# Altium PCB MCU_REVB.PcbDoc (part 1 of 2)
Units mil, origin at the board's own origin, x right, y up, seen from the top; angles counter-clockwise.
Board outline 3775 x 3976.97 mil, 4 copper layers (Top Layer, VCC_MCU_3V3, GND, Bottom Layer), stack 62.449 mil thick; 113 components, 143 nets, 484 pads, 119 vias.
Unrouted connection lines stored in the file: 108.
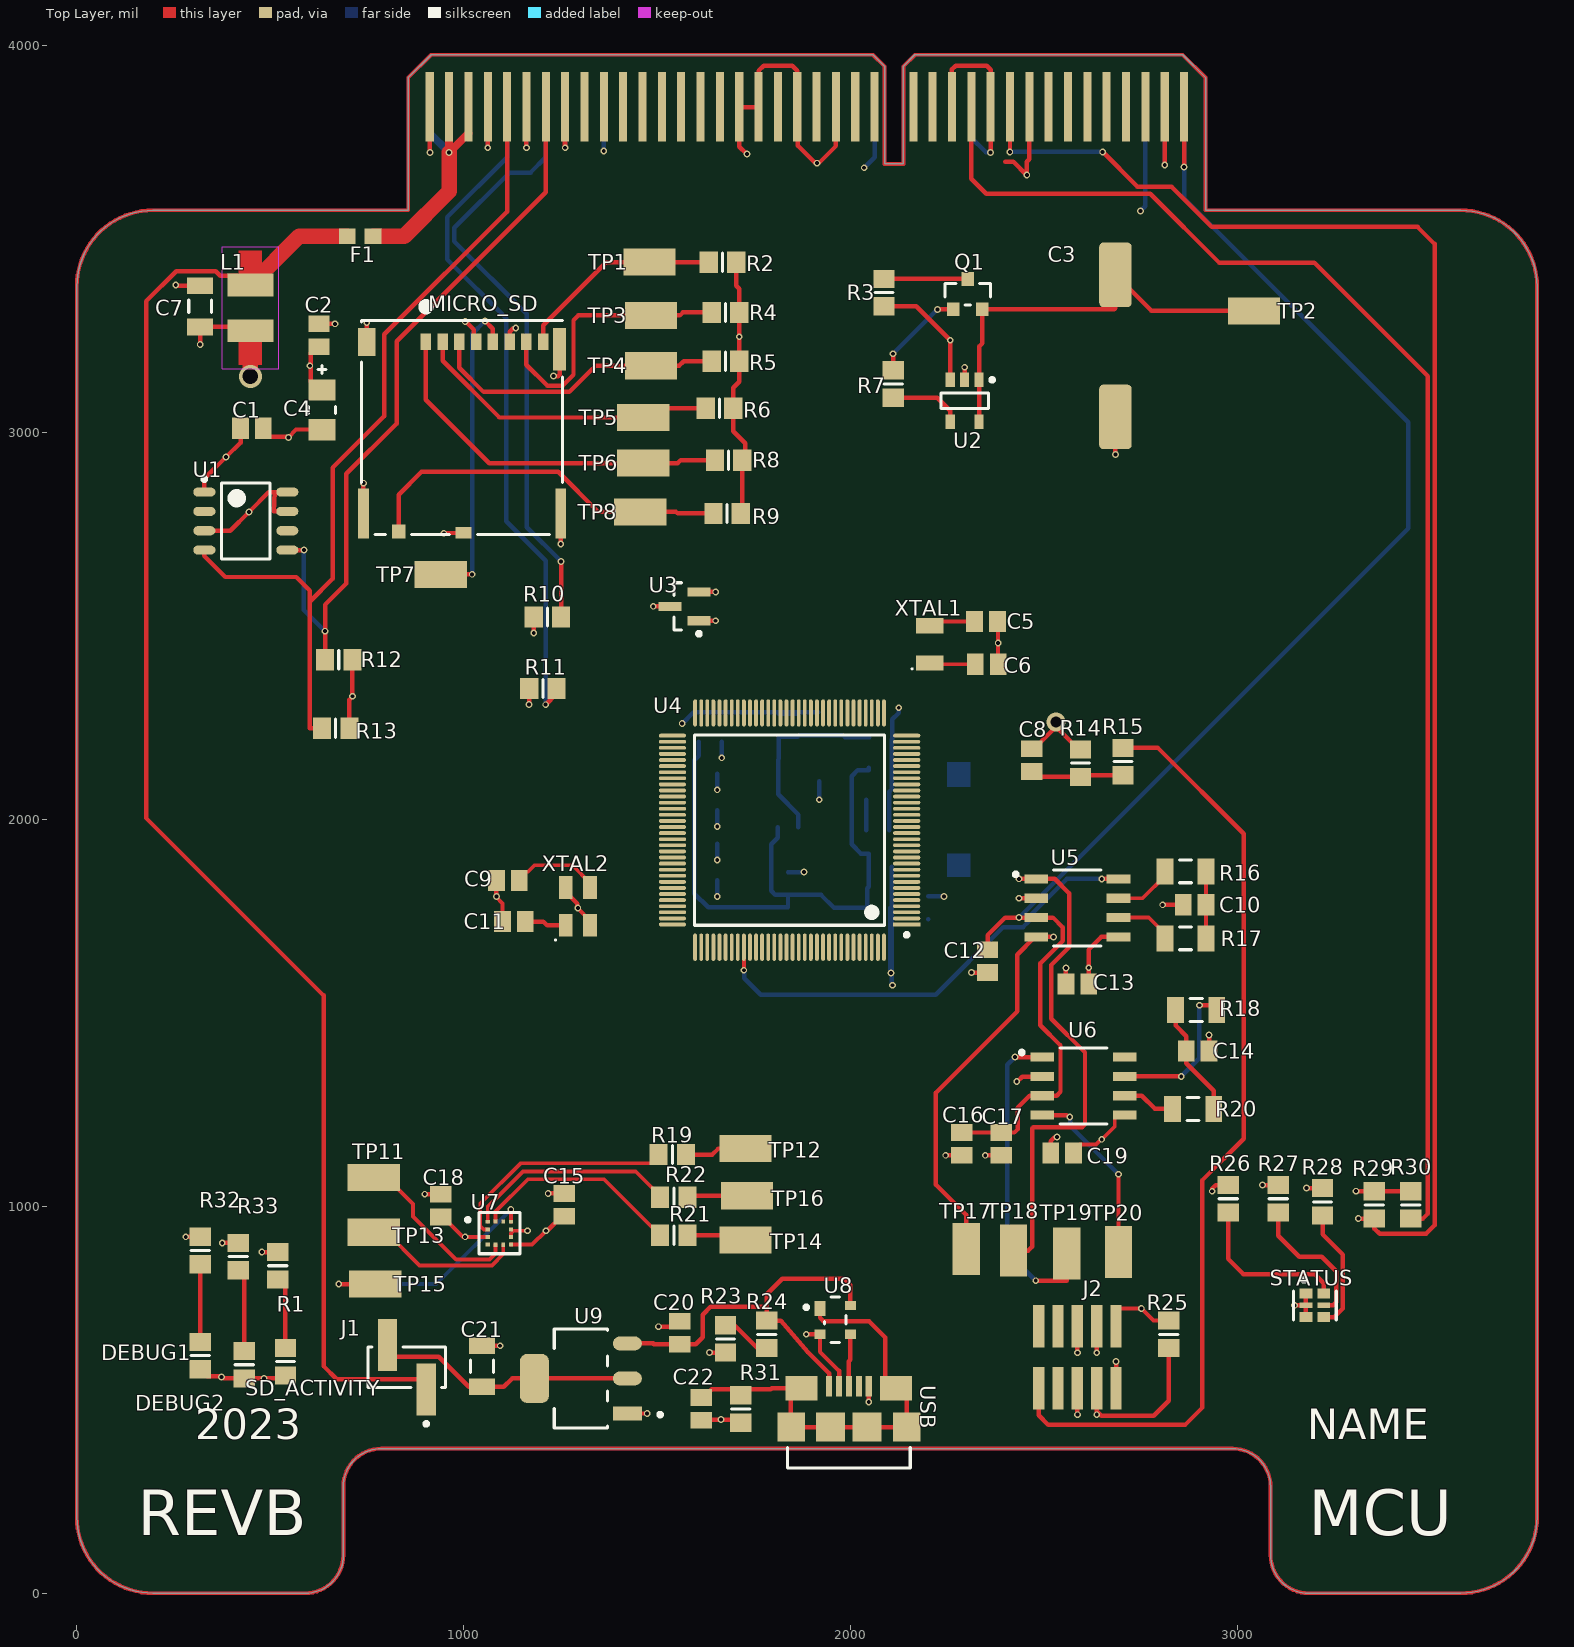
[diagram p0: Top Layer view]
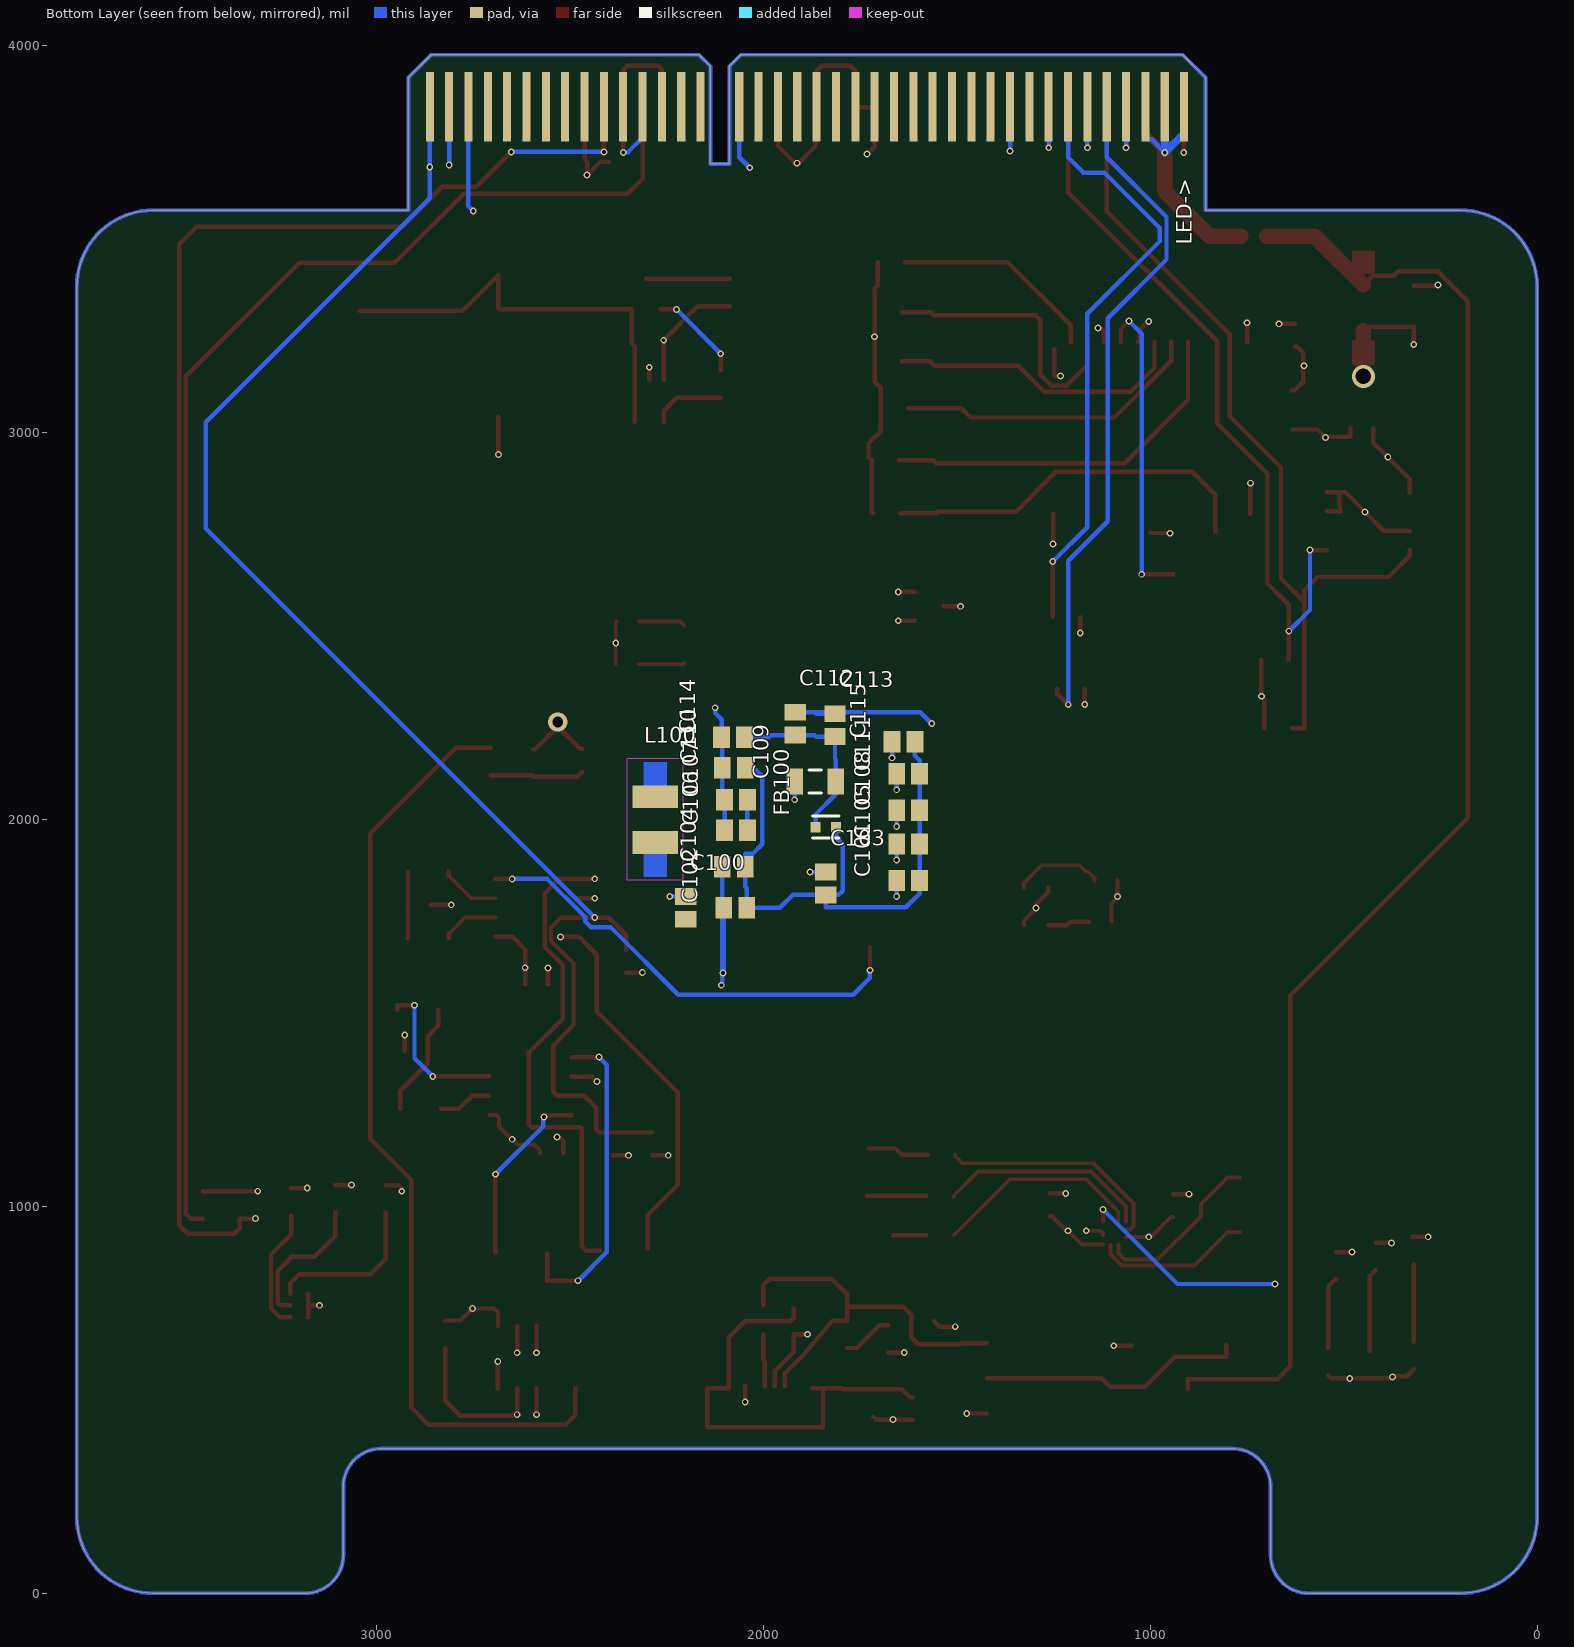
[diagram p1: Bottom Layer view, seen from below]
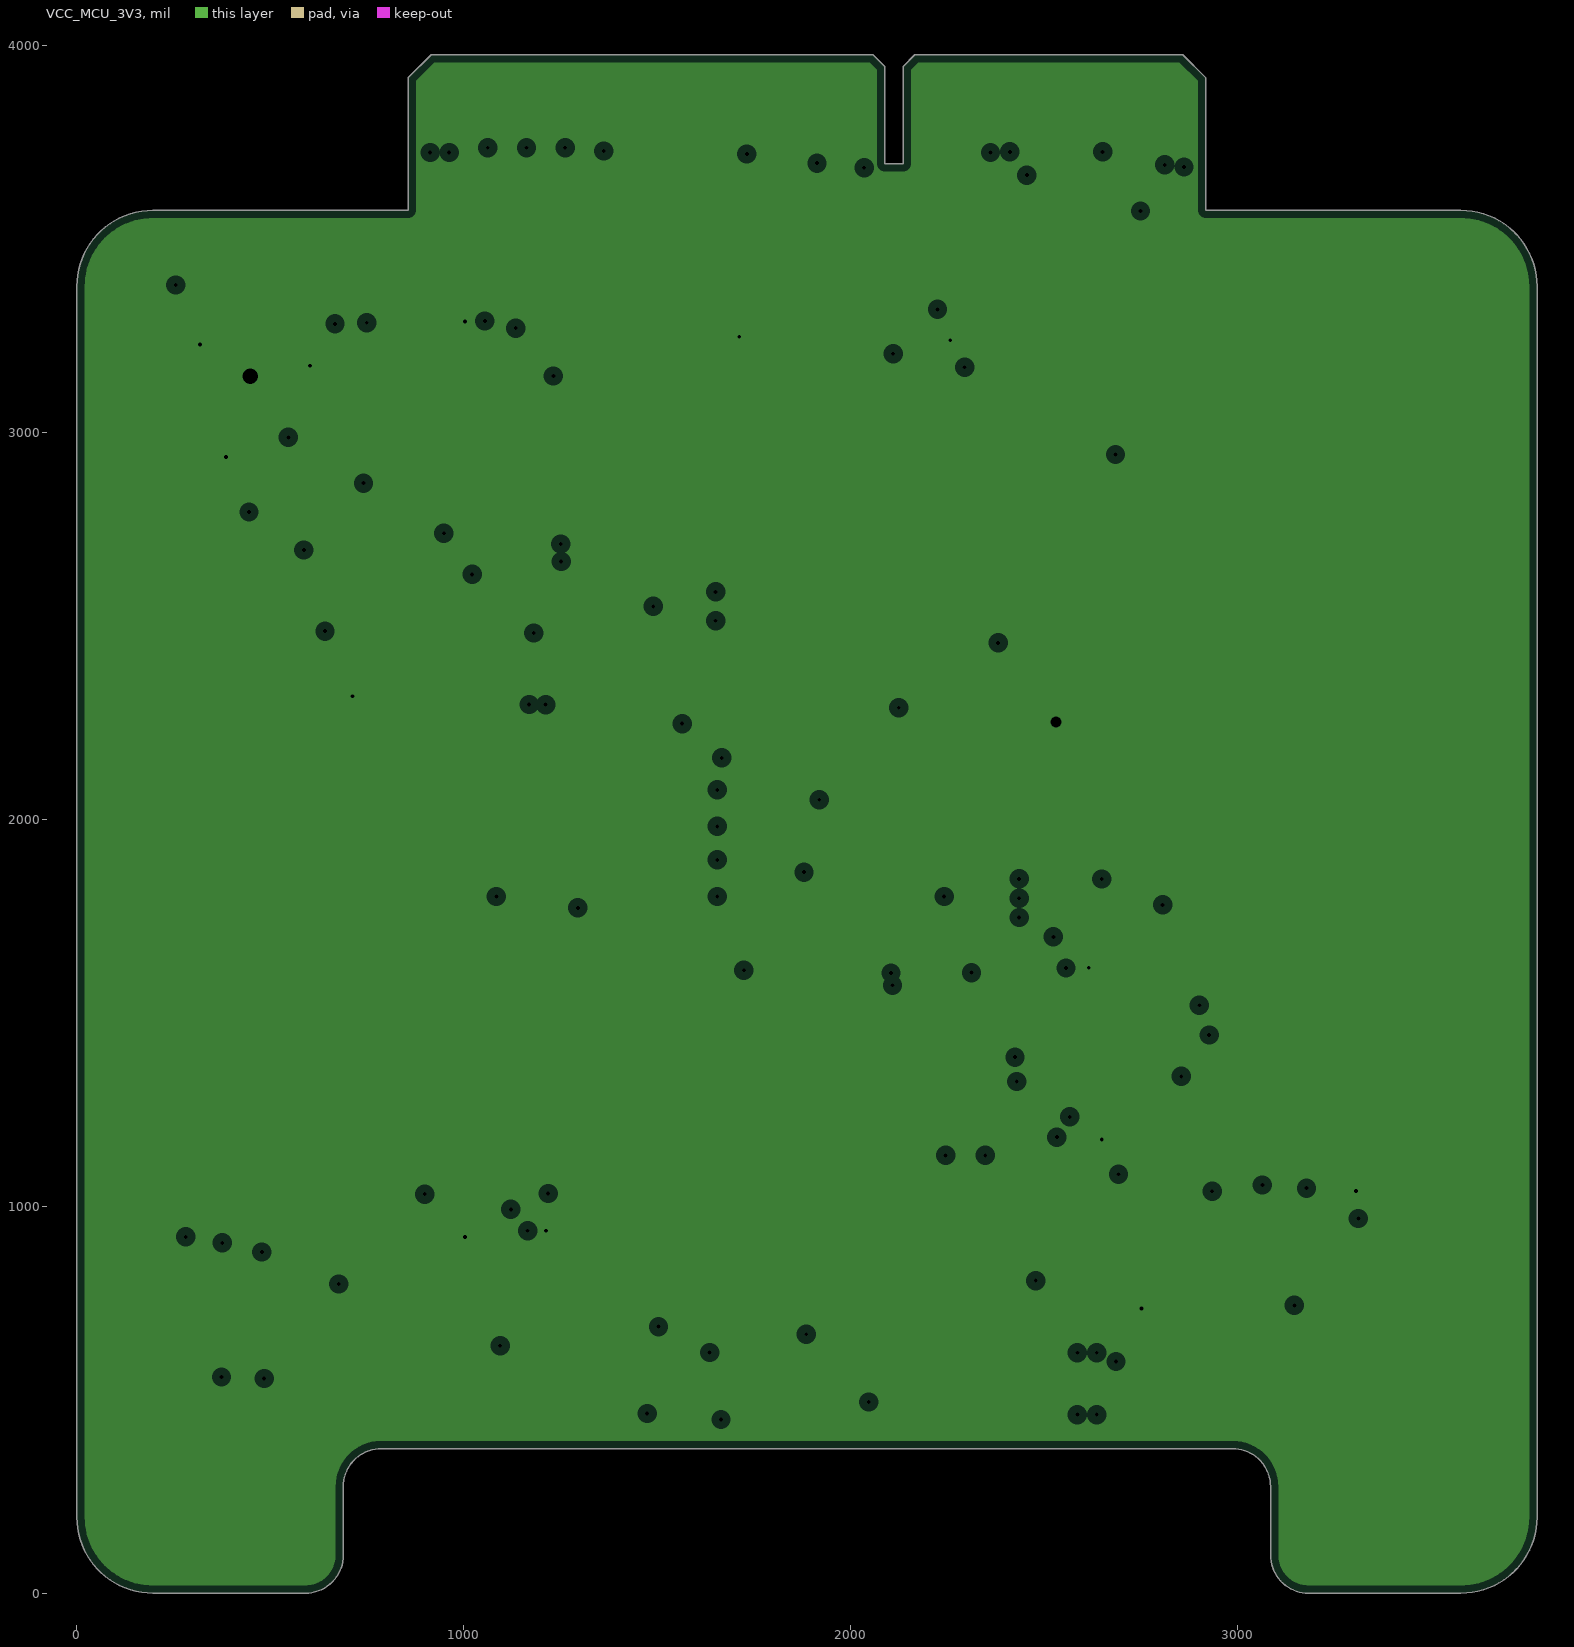
[diagram p2: VCC_MCU_3V3, clearances drawn from the general rule]
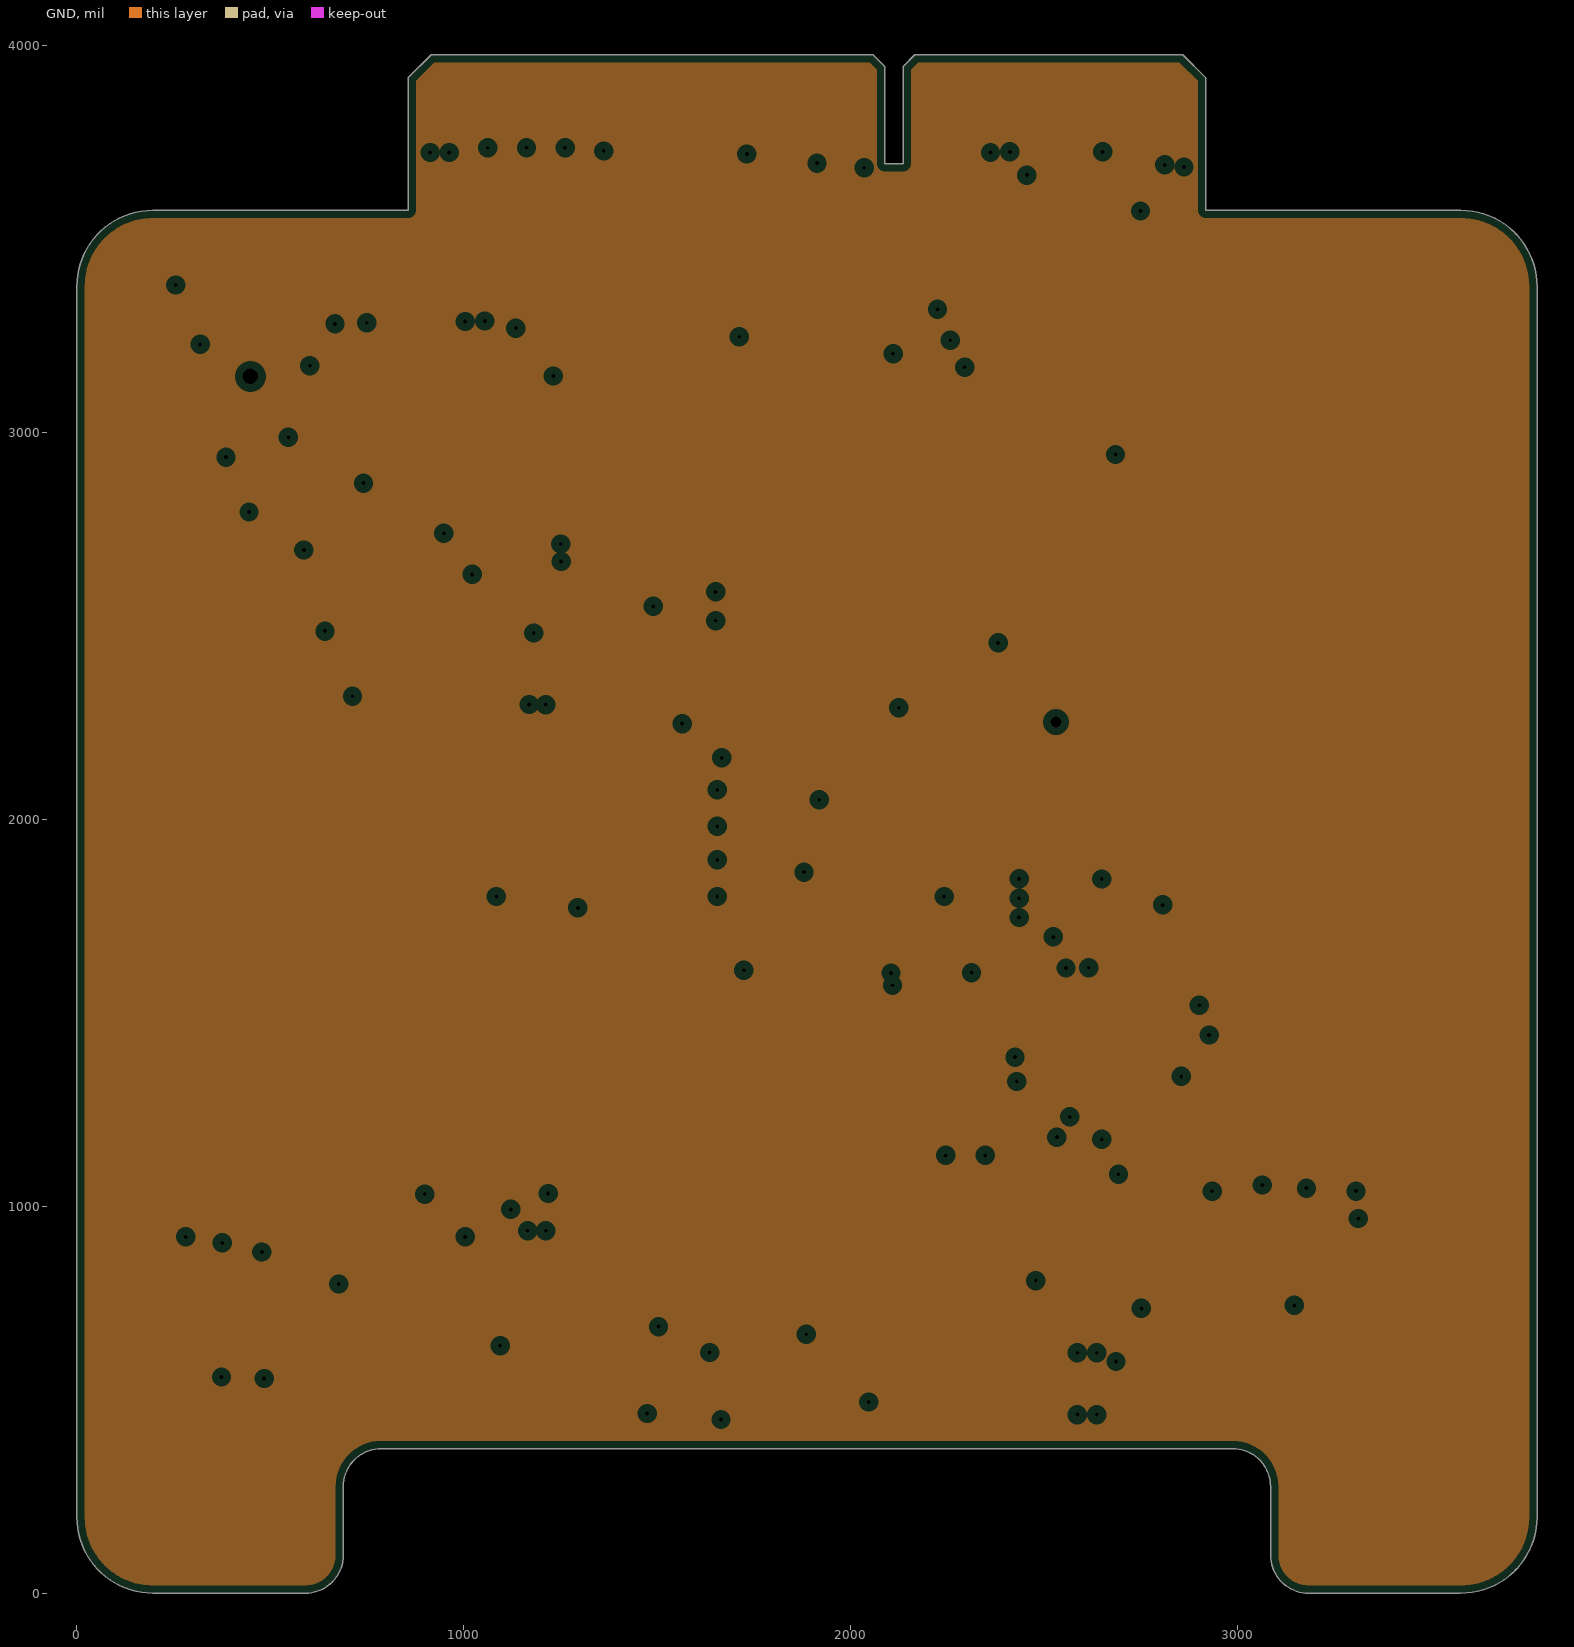
[diagram p3: GND, clearances drawn from the general rule]

## Layer stack, top to bottom
Top Solder: solder mask 0.8, Solder Resist, Dk 3.8
Top Layer: signal copper 1.378
Dielectric 2: prepreg 8.2835, PP-006, Dk 4.6
VCC_MCU_3V3: plane copper 0.5984, net VCC_MCU_3V3
Dielectric 1: dielectric 41.9291, FR-4, Dk 4.6
GND: plane copper 0.5984
Dielectric 3: prepreg 8.2835, PP-006, Dk 4.6
Bottom Layer: signal copper 1.378
Bottom Solder: solder mask 0.8, Solder Resist, Dk 3.8

## Board outline
196.85,0 590.55,0 ccw(c590.55,98.43) 688.98,98.43 688.98,275.59 cw(c787.4,275.59) 787.4,374.02 2987.6,374.02 cw(c2987.6,275.59) 3086.02,275.59 3086.02,98.43 ccw(c3184.45,98.43) 3184.45,0 3578.15,0 ccw(c3578.15,196.85) 3775,196.85 3775,3378.15 ccw(c3578.15,3378.15) 3578.15,3575 2917.99,3575 2917.99,3917.99 2858.94,3976.97 2166.42,3976.97 2136.89,3947.44 2136.89,3695.08 2088.09,3695.08 2088.07,3947.44 2058.54,3976.97 916.02,3976.97 856.97,3917.99 856.99,3575 196.85,3575 ccw(c196.85,3378.15) 0,3378.15 0,196.85 ccw(c196.85,196.85)

## Design rules (kind name [scope] priority, off if disabled: settings)
Clearance Clearance_2 [InComponent('U7')] p1: gap=10 ignorepadtopadclearanceinfootprint=FALSE except(0: Arc-Hole Track-Hole SMDPad-Hole THPad-Hole Via-Hole Fill-Hole Poly-Hole Region-Hole Text-Hole; 5: SMDPad-SMDPad; 9: Arc-Arc Arc-Track Arc-SMDPad Track-Track Track-SMDPad)
Clearance Clearance_1 [InComponent('U4')] p2: gap=10 ignorepadtopadclearanceinfootprint=FALSE except(0: Arc-Hole Track-Hole SMDPad-Hole THPad-Hole Via-Hole Fill-Hole Poly-Hole Region-Hole Text-Hole; 5: Arc-Arc Arc-Track Arc-SMDPad Track-Track Track-SMDPad SMDPad-SMDPad)
Clearance [All] p3: gap=10 ignorepadtopadclearanceinfootprint=FALSE except(0: Arc-Hole Track-Hole SMDPad-Hole THPad-Hole Via-Hole Fill-Hole Poly-Hole Region-Hole Text-Hole; 5: Arc-Arc Arc-Track Track-Track SMDPad-SMDPad THPad-THPad)
HoleSize [All] p1: absolutevalues=TRUE maxlimit=248.03 minlimit=7.87 maxpercent=80.000 minpercent=20.000
HoleToHoleClearance [All] p1: gap=19.68 allowstackedmicrovias=TRUE
MinimumAnnularRing "Via anular ring" [IsVia] p1: minimumring=3.5
MinimumAnnularRing [All] p2: minimumring=9.84
PlaneClearance [All] p1: clearance=20
PlaneConnect [All] p1: pad.planeconnectstyle=Relief pad.reliefexpansion=20 pad.reliefentries=4 pad.reliefconductorwidth=10 pad.reliefairgap=10 via.planeconnectstyle=Direct via.reliefexpansion=20 via.reliefentries=4 via.reliefconductorwidth=10 via.reliefairgap=10
PolygonConnect [All] p1: connectstyle=Relief reliefconductorwidth=10 reliefentries=4 polygonreliefangle="90 Angle" airgapwidth=10
RoutingVias [All] p1: holewidth=10 width=17.5 viastyle="Through Hole" minholewidth=7.87 minwidth=15.75 maxholewidth=248.03 maxwidth=251.97
SilkToSolderMaskClearance [IsPad] p1: minsilkscreentomaskgap=5.91 clearancetoexposedcopper=TRUE
SolderMaskExpansion [All] p1: expansion=1.97 istentingtop=FALSE
Width [All] p1: maxlimit=98.43 minlimit=5 preferedwidth=11.55 minimp=50.000000 maximp=50.000000 favimp=50.000000
25 further rules are at their usual default settings.

## Classes and differential pairs
component class MCU_REVB_0: F1
component class MCU_REVB_4: C10 C12 C13 C14 C16 C17 C19 R16 R17 R18 R20 TP17 TP18 TP19 TP20 U5 U6
component class MCU_REVB_1: C5 C6 C7 C8 C9 C11 C100 C101 C102 C103 C104 C105 C106 C107 C108 C109 C110 C111 C112 C113 C114 C115 FB100 L1 L100 R12 R13 R14 R15 R29 R30 TP11 TP12 TP13 TP14 TP15 TP16 U4 XTAL1 XTAL2
component class MCU_REVB_3: C20 C21 C22 J1 J2 R10 R11 R23 R24 R25 R31 U8 U9 USB
component class MCU_REVB_2: C1 C2 C3 C4 C15 C18 DEBUG1 DEBUG2 MICRO_SD Q1 R1 R2 R3 R4 R5 R6 R7 R8 R9 R19 R21 R22 R26 R27 R28 R32 R33 SD_ACTIVITY STATUS TP1 TP2 TP3 TP4 TP5 TP6 TP7 TP8 U1 U2 U3 U7

## Components (designator, comment, footprint, x,y, rotation, side; value= is the part's Value field where it differs from the comment)
C1 "0.1 µF" C0805 452.76,3011.81 r0 top
C2 "0.1 µF" C0805 625.98,3251.97 r90 top
C3 "FC0H473ZFTBR24" CAPAE1080X580N 2685.04,3224.41 r270 top
C4 "TAJA106K010RNJ" FP-TAJA-MFG 633.86,3059.06 r90 top
C5 "22 pF" C0805 2350.39,2511.81 r180 top
C6 "22 pF" C0805 2352.36,2401.57 r180 top
C7 "10 µF" C1206 318.9,3326.77 r90 top
C8 "100 pF" C0805 2468.5,2153.54 r270 top
C9 "18 pF" C0805 1114.17,1842.52 r0 top
C10 "4.7 µF" C0805 2889.76,1779.53 r180 top
C11 "18 pF" C0805 1129.92,1736.22 r0 top
C12 "0.1 µF" C0805 2354.33,1633.86 r90 top
C13 "0.1 µF" C0805 2586.61,1574.8 r0 top
C14 "4.7 µF" C0805 2897.64,1401.57 r0 top
C15 "0.1µF" C0805 1259.84,1003.94 r90 top
C16 "4.7 µF" C0805 2287.4,1161.42 r90 top
C17 "0.1 µF" C0805 2389.76,1161.42 r90 top
C18 "0.1 µF" C0805 940.95,1001.97 r90 top
C19 "0.1 µF" C0805 2547.24,1137.8 r0 top
C20 "0.1 µF" C0805 1559.06,673.23 r90 top
C21 "10 µF" C1206 1047.24,586.61 r90 top
C22 "4.7 nF" C0805 1614.17,476.38 r270 top
C100 "0.1 µF" C0805 2200.79,1771.65 r90 bottom
C101 "0.1 µF" C0805 1625.98,1842.52 r0 bottom
C102 "0.1 µF" C0805 2072.83,1771.65 r0 bottom
C103 "0.1 µF" C0805 1838.58,1834.65 r90 bottom
C104 "0.1 µF" C0805 2076.77,1877.95 r0 bottom
C105 "0.1 µF" C0805 1625.98,1937.01 r0 bottom
C106 "4.7 µF" C0805 2070.87,1972.44 r0 bottom
C107 "0.1 µF" C0805 2070.87,2051.18 r0 bottom
C108 "0.1 µF" C0805 1625.98,2023.62 r0 bottom
C109 "10 µF" C1206 1866.14,2098.43 r0 bottom
C110 "0.1 µF" C0805 2076.77,2133.86 r0 bottom
C111 "0.1 µF" C0805 1625.98,2118.11 r0 bottom
C112 "0.1 µF" C0805 1917.32,2248.03 r90 bottom
C113 "0.1 µF" C0805 1814.96,2244.09 r90 bottom
C114 "0.1 µF" C0805 2078.74,2212.6 r0 bottom
C115 "0.1 µF" C0805 1637.8,2200.79 r0 bottom
DEBUG1 "LEDSML0805" 6-0805_N 318.9,614.17 r270 top
DEBUG2 "LEDSML0805" 6-0805_N 433.07,590.55 r270 top
F1 "0603SFF150F/32-2" RESC1608X10N 732.28,3507.87 r180 top value=175mR
FB100 "BLM18PG471SN1D" FP-BLM18-0_15-t0_8-MFG 1838.58,1980.32 r0 bottom value=200mR
J1 "TSM-102-01-L-SVJ" FP-TSM-102-01-L-SV-P-TR-MFG 853.15,584.25 r0 top
J2 "DS2482-100" SAMTEC-FTSH-105-01-X-DV 2586.61,610.24 r180 top
L1 "LQH43PN100M26L" LQH43PN100M26L 448.82,3322.83 r270 top
L100 "LQH43PN100M26L" LQH43PN100M26L 2279.53,2000 r90 bottom
MICRO_SD "503398-1892" MOLX-503398-1892_V 996.06,2988.19 r0 top
Q1 "DMG2305UX-13" FP-SOT23-MFG 2303.15,3358.27 r90 top
R1 "22 kΩ" 6-0805_N 519.68,846.46 r90 top
R2 "100 kΩ" 6-0805_N 1669.29,3440.94 r0 top
R3 "220 Ω" 6-0805_N 2086.61,3362.2 r90 top
R4 "100 kΩ" 6-0805_N 1677.16,3311.02 r0 top
R5 "10 kΩ" 6-0805_N 1677.17,3185.04 r0 top
R6 "100 kΩ" 6-0805_N 1661.42,3062.99 r0 top
R7 "1 kΩ" 6-0805_N 2110.24,3125.98 r90 top
R8 "100 kΩ" 6-0805_N 1685.04,2929.13 r0 top
R9 "10 kΩ" 6-0805_N 1681.1,2791.34 r0 top
R10 "33 Ω" 6-0805_N 1216.54,2523.62 r0 top
R11 "33 Ω" 6-0805_N 1204.72,2338.58 r0 top
R12 "2.2 kΩ" 6-0805_N 677.17,2413.39 r0 top
R13 "2.2 kΩ" 6-0805_N 669.29,2236.22 r0 top
R14 "2.2 kΩ" 6-0805_N 2594.49,2145.67 r90 top
R15 "330 Ω" 6-0805_N 2704.72,2149.61 r90 top
R16 "60.4 Ω" C1206 2866.14,1866.14 r180 top
R17 "60.4 Ω" C1206 2866.14,1692.91 r0 top
R18 "60.4 Ω" C1206 2893.7,1507.87 r0 top
R19 "33 Ω" 6-0805_N 1539.37,1133.86 r0 top
R20 "60.4 Ω" C1206 2885.83,1251.97 r0 top
R21 "33 Ω" 6-0805_N 1543.31,925.2 r0 top
R22 "33 Ω" 6-0805_N 1543.31,1023.62 r0 top
R23 "10 kΩ" 6-0805_N 1677.17,657.48 r90 top
R24 "91 kΩ" 6-0805_N 1783.46,669.29 r90 top
R25 "1 kΩ" 6-0805_N 2822.83,669.29 r90 top
R26 "330 Ω" 6-0805_N 2976.38,1019.69 r90 top
R27 "330 Ω" 6-0805_N 3106.3,1019.68 r90 top
R28 "330 Ω" 6-0805_N 3220.47,1011.81 r90 top
R29 "2.2 kΩ" 6-0805_N 3354.33,1003.94 r90 top
R30 "2.2 kΩ" 6-0805_N 3448.82,1003.94 r90 top
R31 "1 MΩ" 6-0805_N 1716.54,476.38 r90 top
R32 "22 kΩ" 6-0805_N 318.9,885.83 r90 top
R33 "22 kΩ" 6-0805_N 417.32,870.08 r90 top
SD_ACTIVITY "LEDSML0805" 6-0805_N 539.37,598.43 r270 top
STATUS "MSL0402RGB" FP-MSL0402-MFG 3200.79,744.09 r90 top
TP1 "5015" KEYSTONE_5015 1480.32,3440.94 r0 top
TP2 "5015" KEYSTONE_5015 3043.31,3314.96 r0 top
TP3 "5015" KEYSTONE_5015 1484.25,3303.15 r0 top
TP4 "5015" KEYSTONE_5015 1484.25,3173.23 r0 top
TP5 "5015" KEYSTONE_5015 1464.57,3039.37 r0 top
TP6 "5015" KEYSTONE_5015 1464.57,2921.26 r0 top
TP7 "5015" KEYSTONE_5015 940.94,2633.86 r180 top
TP8 "5015" KEYSTONE_5015 1456.69,2795.28 r0 top
TP11 "5015" KEYSTONE_5015 767.72,1074.8 r0 top
TP12 "5015" KEYSTONE_5015 1728.35,1149.61 r0 top
TP13 "5015" KEYSTONE_5015 767.72,933.07 r0 top
TP14 "5015" KEYSTONE_5015 1728.35,913.39 r0 top
TP15 "5015" KEYSTONE_5015 771.65,799.21 r0 top
TP16 "5015" KEYSTONE_5015 1732.29,1027.56 r0 top
TP17 "5015" KEYSTONE_5015 2299.21,889.76 r90 top
TP18 "5015" KEYSTONE_5015 2421.25,885.82 r90 top
TP19 "5015" KEYSTONE_5015 2559.06,877.95 r90 top
TP20 "5015" KEYSTONE_5015 2692.91,881.89 r90 top
U1 "CMP-006-000013-2" SOIC127P600X175-8N 437.01,2771.65 r0 top
U2 "BU7265SG-TR" SOT95P280X125-5N 2295.28,3082.68 r270 top
U3 "TC1046VNBTR" SOT-23-NB3_N 1570.87,2551.18 r180 top
U4 "CMP-006-000006-2" FP-MG-IPC_A 1842.52,1972.79 r180 top
U5 "ATA6561" FP-C04-057-OA-MFG 2586.61,1771.65 r0 top
U6 "ATA6561" FP-C04-057-OA-MFG 2602.36,1311.02 r0 top
U7 "KX134-1211" FP-KX134-1211-MFG 1092.52,930.61 r0 top
U8 "PRTR5V0U2AX,215" FP-SOT143B-MFG 1960.63,706.69 r0 top
U9 "LDL1117S33R" FP-SOT223-0046067-IPC_B 1303.15,555.12 r180 top
USB "10118192-0001LF" FCI-10118192-0001LF-5_V 1996.06,429.13 r0 top
XTAL1 "CM7V-T1A-32.768KHZ-12.5PF-10PPM-TA-QC" DFN245P320X65-2N 2204.72,2452.76 r90 top
XTAL2 "RH100-12.000-12-1010-EXT-TR" SON160P320X80-4N 1295.28,1775.59 r90 top

## Footprints (in the part's own frame and the unit in brackets; to place one, negate y for a bottom-side part, rotate by r counter-clockwise, add the part's x,y. Pads: shape width x height; smd on the part's side, far side on the other; paste and mask are expansions set on the pad)
6-0805_N [mm] "Chip Resistor, Body 2.0x1.2mm, IPC Medium Density"
  rect 1.2x1.4 smd: 1(-0.9,0) 2(0.9,0)
  silkscreen extent 0,-0.6 0,0.6, body extent -1.07,-0.7 1.07,0.7, height 0.7
C0805 [mm] "Chip Capacitor, Body 2.0x1.3mm, IPC High Density"
  rect 1.1x1.4 smd: 1(-0.75,0) 2(0.75,0)
  body extent -1.1,-0.72 1.1,0.72, height 1.4
C1206 [mm] "Chip Capacitor, Body 3.2x1.6mm, IPC High Density"
  rect 1.1x1.7 smd: 1(-1.35,0) 2(1.35,0)
  silkscreen extent -0.4,-0.75 0.4,0.75, body extent -1.7,-0.9 1.7,0.9, height 1.3
CAPAE1080X580N [mil]
  rrect25% 166.93x83.86 smd: 1(-183.66,0) 2(183.66,0)
  body extent -261,-218 258,215, height 205
DFN245P320X65-2N [mm] "DFN, 2-Leads, Body 1.50x3.20mm, Pitch 2.45mm, IPC Medium Density"
  rect 1x1.8 smd: 1(-1.225,0) 2(1.225,0)
  silkscreen extent -1.65,1.1 -1.55,1.2, body extent -1.6,-0.75 1.6,0.75, height 0.65
FCI-10118192-0001LF-5_V [mm] "SMD, 5-Leads, Body 8.05x5.77mm, Pitch 0.65mm"
  rect 0.4x1.35 smd: 1(-1.3,2.675) 2(-0.65,2.675) 3(0,2.675) 4(0.65,2.675) 5(1.3,2.675)
  rect 2.1x1.6 smd: 6(-3.1,2.55) 7(3.1,2.55)
  rect 1.8x1.9 smd: 8(-3.8,0) 9(3.8,0)
  rect 1.9x1.9 smd: 10(-1.2,0) 11(1.2,0)
  silkscreen extent -4.03,-2.67 4.03,-1.35, body extent -3.96,-2.6 3.96,3.07, height 2.5
FP-BLM18-0_15-t0_8-MFG [mm]
  rect 0.65x0.7 smd paste+0 mask+0: 1(-0.675,0) 2(0.675,0)
  silkscreen extent -0.87,-0.72 0.87,0.72, body extent -0.8,-0.4 0.8,0.4, height 0.95
FP-C04-057-OA-MFG [mm]
  rect 1.55x0.6 smd paste+0 mask+0: 1(-2.7,1.905) 2(-2.7,0.635) 3(-2.7,-0.635) 4(-2.7,-1.905) 5(2.7,-1.905) 6(2.7,-0.635) 7(2.7,0.635) 8(2.7,1.905)
  silkscreen extent -4.17,-2.5 1.55,2.5, body extent -3.57,-2.75 3.57,2.75, height 0.25
FP-KX134-1211-MFG [mm]
  rect 0.275x0.25 smd paste-1000 mask+0: 1(-0.762,0.75) 2(-0.762,0.25) 3(-0.762,-0.25) 4(-0.762,-0.75) 7(0.763,-0.75) 8(0.763,-0.25) 9(0.763,0.25) 10(0.763,0.75)
  rect 0.25x0.275 smd paste-1000 mask+0: 5(-0.25,-0.763) 6(0.25,-0.763) 11(0.25,0.763) 12(-0.25,0.763)
  silkscreen extent -2.2,-1.35 1.35,1.35, body extent -1.54,-1.54 1.54,1.54, height 0.25
FP-MG-IPC_A [mm]
  rect 1.788x0.25 smd paste+0 mask+0: 1(-7.691,6.2)
  rrect100% 1.788x0.25 smd paste+0 mask+0: 2(-7.691,5.8) 3(-7.691,5.4) 4(-7.691,5) 5(-7.691,4.6) 6(-7.691,4.2) 7(-7.691,3.8) 8(-7.691,3.4) 9(-7.691,3) 10(-7.691,2.6) 11(-7.691,2.2) 12(-7.691,1.8) 13(-7.691,1.4) 14(-7.691,1) 15(-7.691,0.6) 16(-7.691,0.2) 17(-7.691,-0.2) 18(-7.691,-0.6) 19(-7.691,-1) 20(-7.691,-1.4) 21(-7.691,-1.8) 22(-7.691,-2.2) 23(-7.691,-2.6) 24(-7.691,-3) 25(-7.691,-3.4) 26(-7.691,-3.8) 27(-7.691,-4.2) 28(-7.691,-4.6) 29(-7.691,-5) 30(-7.691,-5.4) 31(-7.691,-5.8) 32(-7.691,-6.2) 65(7.691,-6.2) 66(7.691,-5.8) 67(7.691,-5.4) 68(7.691,-5) 69(7.691,-4.6) 70(7.691,-4.2) 71(7.691,-3.8) 72(7.691,-3.4) 73(7.691,-3) 74(7.691,-2.6) 75(7.691,-2.2) 76(7.691,-1.8) 77(7.691,-1.4) 78(7.691,-1) 79(7.691,-0.6) 80(7.691,-0.2) 81(7.691,0.2) 82(7.691,0.6) 83(7.691,1) 84(7.691,1.4) 85(7.691,1.8) 86(7.691,2.2) 87(7.691,2.6) 88(7.691,3) 89(7.691,3.4) 90(7.691,3.8) 91(7.691,4.2) 92(7.691,4.6) 93(7.691,5) 94(7.691,5.4) 95(7.691,5.8) 96(7.691,6.2)
  rrect100% 0.25x1.788 smd paste+0 mask+0: 33(-6.2,-7.691) 34(-5.8,-7.691) 35(-5.4,-7.691) 36(-5,-7.691) 37(-4.6,-7.691) 38(-4.2,-7.691) 39(-3.8,-7.691) 40(-3.4,-7.691) 41(-3,-7.691) 42(-2.6,-7.691) 43(-2.2,-7.691) 44(-1.8,-7.691) 45(-1.4,-7.691) 46(-1,-7.691) 47(-0.6,-7.691) 48(-0.2,-7.691) 49(0.2,-7.691) 50(0.6,-7.691) 51(1,-7.691) 52(1.4,-7.691) 53(1.8,-7.691) 54(2.2,-7.691) 55(2.6,-7.691) 56(3,-7.691) 57(3.4,-7.691) 58(3.8,-7.691) 59(4.2,-7.691) 60(4.6,-7.691) 61(5,-7.691) 62(5.4,-7.691) 63(5.8,-7.691) 64(6.2,-7.691) 97(6.2,7.691) 98(5.8,7.691) 99(5.4,7.691) 100(5,7.691) 101(4.6,7.691) 102(4.2,7.691) 103(3.8,7.691) 104(3.4,7.691) 105(3,7.691) 106(2.6,7.691) 107(2.2,7.691) 108(1.8,7.691) 109(1.4,7.691) 110(1,7.691) 111(0.6,7.691) 112(0.2,7.691) 113(-0.2,7.691) 114(-0.6,7.691) 115(-1,7.691) 116(-1.4,7.691) 117(-1.8,7.691) 118(-2.2,7.691) 119(-2.6,7.691) 120(-3,7.691) 121(-3.4,7.691) 122(-3.8,7.691) 123(-4.2,7.691) 124(-4.6,7.691) 125(-5,7.691) 126(-5.4,7.691) 127(-5.8,7.691) 128(-6.2,7.691)
  silkscreen extent -7.82,-6.25 6.25,7, body extent -9.09,-9.09 9.09,9.09, height 0.25
FP-MSL0402-MFG [mm]
  rect 0.67x0.83 smd paste+0 mask+0: 1(0.77,0.585) 3(-0.77,0.585) 4(-0.77,-0.585) 6(0.77,-0.585)
  rect 0.37x0.83 smd paste+0 mask+0: 2(0,0.585) 5(0,-0.585)
  silkscreen extent -0.95,-1.4 1.8,1.4, body extent -1.2,-1.1 1.2,1.1, height 0.25
FP-SOT23-MFG [mm]
  rect 0.9x0.8 smd paste+0 mask+0: 1(-1,0.95) 2(-1,-0.95) 3(1,0)
  silkscreen extent -0.7,-1.5 0.7,1.5, body extent -1.55,-1.6 1.55,1.6, height 0.25
FP-SOT143B-MFG [mm]
  rect 0.7x1 smd paste-1000 mask+0: 1(-1,0.75)
  rect 0.7x0.6 smd paste-1000 mask+0: 2(-1,-0.95) 3(1,-0.95) 4(1,0.95)
  silkscreen extent -2.02,-1.5 0.7,1.5, body extent -1.5,-1.63 1.5,1.63, height 0.25
FP-SOT223-0046067-IPC_B [mm]
  rect 1.904x0.92 smd paste+0 mask+0: 1(-3.05,2.3)
  rrect100% 1.904x0.92 smd paste+0 mask+0: 2(-3.05,0) 3(-3.05,-2.3)
  rrect48% 1.904x3.22 smd paste+0 mask+0: 4(3.05,0)
  silkscreen extent -5.33,-3.25 1.75,3.25, body extent -4.25,-3.5 4.25,3.5, height 0.25
FP-TAJA-MFG [mm]
  rect 1.4x1.8 smd paste+0 mask+0: 1(-1.3,0) 2(1.3,0)
  silkscreen extent -0.23,-0.9 2.9,0.9, body extent -2.1,-1 2.1,1, height 0.25
FP-TSM-102-01-L-SV-P-TR-MFG [mm]
  rect 1.27x3.43 smd paste+0 mask+0: 1(1.27,-1.46) 2(-1.27,1.46)
  silkscreen extent -2.54,-3.85 2.54,1.34, body extent -2.64,-3.27 2.64,3.27, height 0.25
KEYSTONE_5015 [mm]
  rect 3.43x1.78 smd: 1(0,0)
  body extent -1.33,-0.51 1.33,0.51, height 1.52
LQH43PN100M26L [mm]
  rect 1.5x3 smd: 1(-1.5,0) 2(1.5,0)
  Top Layer region: 3.75,0.75 3.75,-0.751 2.159,-0.751 2.159,0.75
  Top Layer region: -3.753,-0.751 -3.753,0.75 -2.25,0.75 -2.25,-0.751
  Top Layer keep-out lines w0.05: 4,-1.85 -4,-1.85 -4,1.85 4,1.85 4,-1.85
  body extent -2.25,-1.6 2.25,1.6, height 2.8
MOLX-503398-1892_V [mm] "CONN, 8-Leads, Body 14.05x13.2mm, Pitch 1.1mm"
  rect 0.7x1.1 smd: 1(-2.38,6.27) 2(-1.28,6.27) 3(-0.18,6.27) 4(0.92,6.27) 5(2.02,6.27) 6(3.12,6.27) 7(4.22,6.27) 8(5.32,6.27)
  rect 1.05x0.78 smd: 9(0.095,-6.27)
  rect 0.9x0.93 smd: 10(-4.17,-6.195)
  rect 0.86x2.8 smd: 11(6.4,5.77)
  rect 0.7x3.3 smd: 12(6.48,-5.01) 13(-6.48,-5.01)
  rect 1.14x1.83 smd: 14(-6.26,6.255)
  silkscreen extent -6.6,-6.38 6.6,8.82, body extent -6.55,-6.38 6.55,7.67, height 1.28
RESC1608X10N [mm] "Chip Resistor, 2-Leads, Body 1.60x0.80mm, IPC Medium Density"
  rect 1.09x1 smd: 1(-0.85,0) 2(0.85,0)
  body extent -0.87,-0.48 0.87,0.48, height 0.95
SAMTEC-FTSH-105-01-X-DV [mil]
  rect 29.13x109.84 smd mask+0: 1(-100,-80) 2(-100,80) 3(-50,-80) 4(-50,80) 5(0,-80) 6(0,80) 7(50,-80) 8(50,80) 9(100,-80) 10(100,80)
  body extent -125,-115 125,115, height 234
SOIC127P600X175-8N [mm] "SOIC, 8-Leads, Body 4.90x3.90mm, Pitch 1.27mm, IPC Medium Density"
  oval 1.45x0.6 smd: 1(-2.725,1.905) 2(-2.725,0.635) 3(-2.725,-0.635) 4(-2.725,-1.905) 5(2.725,-1.905) 6(2.725,-0.635) 7(2.725,0.635) 8(2.725,1.905)
  silkscreen extent -2.85,-2.5 1.6,2.88, body extent -3,-2.5 3,2.5, height 1.75
SON160P320X80-4N [mm] "SON, 4-Leads, Body 2.50x3.20mm, Pitch 1.60mm, IPC Medium Density"
  rect 1.5x0.9 smd: 1(-1.245,0.8) 2(-1.245,-0.8) 3(1.245,-0.8) 4(1.245,0.8)
  silkscreen extent -2.26,1.41 -2.16,1.51, body extent -1.7,-1.35 1.7,1.35, height 0.8
SOT95P280X125-5N [mm] "SOT23, 5-Leads, Body 2.90x2.80mm, Pitch 0.95mm, IPC Medium Density"
  rect 0.95x0.6 smd: 1(-1.375,0.95) 2(-1.375,0) 3(-1.375,-0.95) 4(1.375,-0.95) 5(1.375,0.95)
  silkscreen extent -1.5,-1.55 0.5,1.93, body extent -1.5,-1.55 1.5,1.55, height 1.25
SOT-23-NB3_N [mm] "SOT23, 3-Leads, Body 2.9x1.3mm, Pitch 0.95mm, Lead Span 2.4mm, IPC Medium Density"
  rect 1.5x0.6 smd: 1(-0.95,0.95) 2(-0.95,-0.95) 3(0.95,0)
  silkscreen extent -1.07,-1.55 0.7,1.92, body extent -0.7,-1.52 0.7,1.53, height 1.12

## Part data
C1 C2 C5 C6 C8 C9 C10 C11 C12 C13 C14 C15 C16 C17 C18 C19 C20 C22 C100 C101 C102 C103 C104 C105 C106 C107 C108 C110 C111 C112 C113 C114 C115: library part C-EUC0805, "CAPACITOR, European symbol", DeviceName=C0805, DeviceSetName=C-EU, GateName_1=G$1, LibraryName=rcl, POPULARITY=88, SPICEPREFIX=C, SymbolName_1=C-EU
C3: library part CMP-002-000008-3, PACKAGE=CAPAE1080X580N, Component Type=Standard, Design Item ID=FC0H473ZFTBR24, DeviceSetName=FC0H473ZFTBR24, GateName_1=G$1, LibraryName="MCU Board", Pin Count=2, Source="MCU Board.SCHLIB", SymbolName_1=CAP_POL
C4: library part CMP-002-000009-2, "Cap Tant Solid 10uF 10V A CASE 10%( 3.2 X 1.6 X 1.6mm) Inward L SMD 3216-18 3 Ohm 125C T/R", PACKAGE=1206-POL, Component Type=Standard, Design Item ID=TAJA106K010RNJ, DeviceSetName=TAJA106K010RNJ, GateName_1=G$1, LibraryName="MCU Board", Pin Count=2, Source="MCU Board.SCHLIB", SymbolName_1=CAP
C7 C21 C109: library part C-EUC1206, "CAPACITOR, European symbol", DeviceName=C1206, DeviceSetName=C-EU, GateName_1=G$1, LibraryName=rcl, POPULARITY=54, SPICEPREFIX=C, SymbolName_1=C-EU
DEBUG1 DEBUG2 SD_ACTIVITY: "LED   OSRAM: - CHIPLED LG R971, LG N971, LY N971, LG Q971, LY Q971, LO R971, LY R971 LH N974, LH R974 LS Q976, LO Q976, LY Q976 LO Q996 - Hyper CHIPLED LW Q18S LB Q993, LB Q99A, LB R99A - SideLED LS A670, LO A670, LY A670, LG A670, LP A670 LB A673, LV A673, LT A673, LW A673 LH A674 LY A675 LS A676, LA A676, LO A676, LY A676, LW A676 LS A679, LY A679, LG A679 -  Hyper Micro SIDELEDÂ® LS Y876, LA Y876, LO Y876, LY Y876 LT Y87S - SmartLED LW L88C, LW L88S LB L89C, LB L89S, LG L890 LS L89K, LO L89K, LY L89K LS L896, LA L896, LO L896, LY L896 - TOPLED LS T670, LO T670, LY T670, LG T670, LP T670 LSG T670, LSP T670, LSY T670, LOP T670, LYG T670 LG T671, LOG T671, LSG T671 LB T673, LV T673, LT T673, LW T673 LH T674 LS T676, LA T676, LO T676, LY T676, LB T676, LH T676, LSB T676, LW T676 LB T67C, LV T67C, LT T67C, LS T67K, LO T67K, LY T67K, LW E67C LS E67B, LA E67B, LO E67B, LY E67B, LB E67C, LV E67C, LT E67C LW T67C LS T679, LY T679, LG T679 LS T770, LO T770, LY T770, LG T770, LP T770 LB T773, LV T773, LT T773, LW T773 LH T774 LS E675, LA E675, LY E675, LS T675 LS T776, LA T776, LO T776, LY T776, LB T776 LHGB T686 LT T68C, LB T68C - Hyper Mini TOPLEDÂ® LB M676 - Mini TOPLED SantanaÂ® LG M470 LS M47K, LO M47K, LY M47K    Source: http://www.osram.convergy.de   LUXEON: - LUMILEDÂ® LXK2-PW12-R00, LXK2-PW12-S00, LXK2-PW14-U00, LXK2-PW14-V00 LXK2-PM12-R00, LXK2-PM12-S00, LXK2-PM14-U00 LXK2-PE12-Q00, LXK2-PE12-R00, LXK2-PE12-S00, LXK2-PE14-T00, LXK2-PE14-U00 LXK2-PB12-K00, LXK2-PB12-L00, LXK2-PB12-M00, LXK2-PB14-N00, LXK2-PB14-P00, LXK2-PB14-Q00 LXK2-PR12-L00, LXK2-PR12-M00, LXK2-PR14-Q00, LXK2-PR14-R00 LXK2-PD12-Q00, LXK2-PD12-R00, LXK2-PD12-S00 LXK2-PH12-R00, LXK2-PH12-S00 LXK2-PL12-P00, LXK2-PL12-Q00, LXK2-PL12-R00    Source: www.luxeon.com   KINGBRIGHT:   KA-3528ASYC Source: www.kingbright.com", DeviceName=SML0805, DeviceSetName=LED, GateName_1=G$1, LibraryName=led, POPULARITY=17, SymbolName_1=LED
F1: library part CMP-00019-1, "0603SFF Series - 0603 Size Lead-Free, Halogen Free, Fast-Acting Chip Fuse, 1.5 A, 63 VDC, RoHS", Case Code (Imperial)=0603, Case Code (Metric)=1608, Current=500mA, DC Cold Resistance=175mR, Max Operating Temperature=105°C, Min Operating Temperature=-20°C, Package Quantity=10000, Voltage Rating=50V, Approvals=UL, Case/Package=0603, Contact Plating=Tin, Current Rating=500mA, Depth=0.8mm, Fuse Current=500mA, Fuse Type="Board Mount (Cartridge Style Excluded)", Height=0.45mm, Length=1.6mm, Mounting Technology="Surface Mount", Packaging="Tape and Reel", Pins=2, Reach SVHC Compliant=Yes, RoHS Compliant=Yes, Series=SF-0603S, Termination=SMD/SMT, Voltage Rating (DC)=50V, Width=0.8mm
FB100: library part CMP-006-000008-2, "0603 470Ω ±25% DCR=0.20Ω 1A", Case Code (Imperial)=0603, Case Code (Metric)=1608, Current Rating=1A, DC Resistance (DCR)=200mR, Max Operating Temperature=125°C, Min Operating Temperature=-55°C, Package Quantity=1, Test Frequency=100MHz, Tolerance=25%, Case/Package=0603, Component Type=Standard, Core Material=Ferrite, DC Current=1A, DC Resistance-Max=200mR, Depth=0.8mm, Design Item ID=BLM18PG471SN1D, DeviceSetName=BLM18PG471SN1D, GateName_1=G$1, Height=0.8mm, Impedance=470R, Lead Free="Lead Free", Length=1.6mm, LibraryName="MCU Board", Material=Steel,Ferrite, Max Current Rating=1A, Max DC Current=1A, Military Standard=Not, Number of Circuits=1, Number of Lines=1, PACKAGE=0603, Packaging="Tape and Reel", Pin Count=2, Pins=2, Radiation Hardening=No, Reach SVHC Compliant=Yes, RoHS Compliant=Yes, Series=BLM18P, Source="MCU Board.SCHLIB", SymbolName_1=FERRITE_BEAD, Termination=SMD/SMT, Width=0.8mm
J1: library part CMP-006-000025-2, "Conn Unshrouded Header HDR 2 POS 2.54mm Solder ST Top Entry SMD T/R", Housing Color=Black, Max Current Rating=7A, Max Operating Temperature=125°C, Max Voltage Rating (AC)=475V, Min Operating Temperature=-55°C, PACKAGE=TSM-102-01-L-SV, Component Type=Standard, Contact Material=Bronze, Contact Plating=Gold, Depth=2.54mm, Design Item ID=TSM-102-01-L-SVJ, DeviceName=J, DeviceSetName=TSM-102-01-L-SV, DIGI-KEY_PART_NUMBER=SAM14923TR-ND, GateName_1=A, Gender=Male, Housing Material=Polymer, Lead Free="Lead Free", Length=5.08mm, LibraryName="MCU Board", MF=Samtec, MP=TSM-102-01-L-SV, Number of Contacts=2, Number of Rows=1, Orientation=Straight, Packaging="Tape and Reel", Pin Count=2, Pitch=2.54mm, Radiation Hardening=No, Reach SVHC Compliant=Yes, RoHS Compliant=Yes, Source="MCU Board.SCHLIB", SymbolName_1=TSM-102-01-L-SVA, Termination=Solder, TOBY_UK-PURCHASE-URL=https://snapeda.com/shop?store=Toby+UK&id=2748087
J2: library part CMP-006-000020-2, "Conn Unshrouded Header HDR 10 POS 1.27mm Solder ST Top Entry SMD Tube", Color=Black, Current Rating=1.75A, Max Operating Temperature=125°C, Min Operating Temperature=-55°C, PACKAGE=SAMTEC-FTSH-105-01-X-DV, Package Quantity=1, Component Type=Standard, Connector Type="Male Pin", Contact Material=Bronze, Contact Mating Length=0.12inch, Contact Plating=Gold, Contact Type="Male Pin", Depth=3.43mm, Design Item ID=SAMTEC-FTSH-105-01-X-DVJ, DeviceName=J, DeviceSetName=SAMTEC-FTSH-105-01-X-DV, GateName_1=A, Gender=Male, Housing Color=Black, Housing Material=Polymer, Lead Free="Lead Free", Length=6.35mm, LibraryName="MCU Board", Max Current Rating=1.75A, Mounting Technology="Surface Mount", Number of Contacts=10, Number of Positions=10, Number of Rows=2, Orientation=Straight, Packaging=Bulk, Pin Count=10, Pitch=1.27mm, Reach SVHC Compliant=Yes, RoHS Compliant=Yes, Row Spacing=0.05inch, Series=FTSH, Source="MCU Board.SCHLIB", SymbolName_1=SAMTEC-FTSH-105-01-X-DVA, Termination=Solder
L1 L100: library part CMP-004-000001-3, Component Type=Standard, Design Item ID=LQH43PN100M26L, DeviceSetName=LQH43PN100M26L, GateName_1=G$1, LibraryName="MCU Board", PACKAGE=LQH43PN100M26L, Pin Count=2, Source="MCU Board.SCHLIB", SymbolName_1=INDUCTOR
MICRO_SD: library part CMP-006-000002-3, "1.10mm Pitch microSD Memory Card Connector, Normal Mount Surface Mount, Push-Push Type, 1.28mm Height", Current Rating=500mA, Max Operating Temperature=85°C, Min Operating Temperature=-25°C, PACKAGE=MOLEX_503398-1892, Package Quantity=2400, Voltage Rating (AC)=10V, Component Type=Standard, Connector Type=Connector, Contact Material="Bronze,Stainless Steel", Contact Plating=Gold, Depth=14.05mm, Design Item ID=503398-1892, DeviceSetName=503398-1892, GateName_1=G$1, Gender=Male, Halogen Free="Low Halogen", Housing Material=Thermoplastic, Length=13.6mm, LibraryName="MCU Board", Mounting Technology="Surface Mount", Number of Circuits=8, Number of Contacts=8, Number of Rows=1, Orientation="Right Angle", Packaging="Tape and Reel", Pin Count=10, Pitch=1.1mm, Radiation Hardening=No, RoHS Compliant=Yes, Series=503398, Source="MCU Board.SCHLIB", SymbolName_1=503398-1892, Termination=Solder, Width=14.05mm
Q1: library part CMP-006-000012-2, "P-Channel 20 V 65 Ohms Surface Mount Enhancement Mode Mosfet - SOT-23-3", Case/Package=SOT-23, Continuous Drain Current (ID)=4.2A, Drain to Source Breakdown Voltage=-20V, Drain to Source Resistance=52mR, Drain to Source Voltage (Vdss)=20V, Drain-source On Resistance-Max=65MR, Gate to Source Voltage (Vgs)=8V, Input Capacitance=808pF, Max Operating Temperature=150°C, Max Power Dissipation=1.4W, Min Operating Temperature=-55°C, PACKAGE=SOT91P240X110-3N, Package Quantity=1, Threshold Voltage=-900mV, AVAILABILITY=Good, Component Type=Standard, Design Item ID=DMG2305UX-13, DeviceSetName=DMG2305UX-13, Element Configuration=Single, Fall Time=34.7ns, GateName_1=G$1, Height=1.1mm, Lead Free="Lead Free", Length=3mm, LibraryName="MCU Board", MF="Diodes Zetex", Mounting Technology="Surface Mount", MP=DMG2305UX-13, Number of Channels=1, On-State Resistance=65MR, Packaging="Tape and Reel", Pin Count=3, Pins=3, Polarity=P-CHANNEL, PRICE=None, PURCHASE-URL=https://pricing.snapeda.com/search/part/DMG2305UX-13/?ref=eda, Radiation Hardening=No, Rds On Max=52mR, Reach SVHC Compliant=Yes, Rise Time=13.7ns, RoHS Compliant=Yes, Series=-, Source="MCU Board.SCHLIB", SymbolName_1=DMG2305UX-13, Turn-Off Delay Time=79.3ns, Turn-On Delay Time=10.8ns, Weight=0.000282oz, Width=1.4mm
R1 R2 R3 R4 R5 R6 R7 R8 R9 R10 R11 R12 R13 R14 R15 R19 R21 R22 R23 R24 R25 R26 R27 R28 R29 R30 R31 R32 R33: library part R-US_R0805, "RESISTOR, American symbol", DeviceName=R0805, DeviceSetName=R-US_, GateName_1=G$1, LibraryName=rcl, POPULARITY=85, SPICEPREFIX=R, SymbolName_1=R-US
R16 R17 R18 R20: library part R-US_R1206, "RESISTOR, American symbol", DeviceName=R1206, DeviceSetName=R-US_, GateName_1=G$1, LibraryName=rcl, POPULARITY=19, SPICEPREFIX=R, SymbolName_1=R-US
STATUS: library part CMP-003-000006-2, "LEDRGBDIFFUSEDSMD", Component Type=Standard, Design Item ID=MSL0402RGB, DeviceSetName=MSL0402RGB, GateName_1=G$1, LibraryName="MCU Board", PACKAGE=MSL0402RGB, Pin Count=6, Source="MCU Board.SCHLIB", SymbolName_1=MSL0402RGB
TP1 TP2 TP3 TP4 TP5 TP6 TP7 TP8 TP11 TP12 TP13 TP14 TP15 TP16 TP17 TP18 TP19 TP20: library part CMP-005-000003-3, PACKAGE=KEYSTONE_5015, AVAILABILITY=Unavailable, Component Type=Standard, Design Item ID=5015, DeviceSetName=5015, GateName_1=G$1, LibraryName="MCU Board", MF="Keystone Electronics", MOUSER-PURCHASE-URL=https://snapeda.com/shop?store=Mouser&id=48459, MP=5015, Pin Count=1, PRICE=None, Source="MCU Board.SCHLIB", SymbolName_1=5015
U1: "ds2482-100 single-channel 1-wire master i_c to 1-wire bridge device that interfaces directly to standard (100khz...", PACKAGE=SOIC8, Component Type=Standard, Design Item ID=DS2482-100, DeviceSetName=DS2482-100, GateName_1=G$1, LibraryName="MCU Board", Pin Count=8, Source="MCU Board.SCHLIB", SymbolName_1=DS2482-100
U2: library part CMP-006-000009-3, "Operational Amplifier, Single, 4 kHz, 1, 2.4 V/ms, 1.8V to 5.5V, SSOP, 5 RoHS Compliant: Yes", Case/Package=SSOP, Input Bias Current=1pA, Input Offset Voltage (Vos)=1mV, Max Operating Temperature=105°C, Max Supply Voltage=5.5V, Min Operating Temperature=-40°C, Min Supply Voltage=1.8V, Operating Supply Current=350nA, Output Current per Channel=4mA, PACKAGE=SOT95P285X145-5N, Package Quantity=1, Voltage Gain=95dB, Amplifier Type="GENERAL PURPOSE", Bandwidth=4kHz, Common Mode Rejection Ratio=45dB, Component Type=Standard, Design Item ID=BU7265SG-TR, DeviceSetName=BU7265SG-TR, Gain Bandwidth Product=4kHz, GateName_1=G$1, Lead Free="Lead Free", LibraryName="MCU Board", Mounting Technology="Surface Mount", Number of Amplifiers=1, Number of Circuits=1, Packaging="Tape and Reel", Pin Count=5, Pins=5, Radiation Hardening=No, RoHS Compliant=Yes, Series=-, Slew Rate=0.024V/µs, Source="MCU Board.SCHLIB", SymbolName_1=OP-AMP
U3: library part CMP-006-000023-2, "Analog Output Temperature Sensor, 2.7 to 4.4V, SOT-23-3, RoHS", Case/Package=TO-236-3, Max Operating Temperature=125°C, Max Output current=100uA, Max Supply Voltage=4.4V, Min Operating Temperature=-40°C, Min Supply Voltage=2.7V, Operating Supply Current=60uA, Operating Supply Voltage=3.3V, PACKAGE=SOT95P237X112-3N, Package Quantity=3000, Accuracy=2%, ARROW_ELECTRONICS-PURCHASE-URL=https://snapeda.com/shop?store=Arrow+Electronics&id=234729, AVAILABILITY=Good, Component Type=Standard, Contact Plating=Tin,Matte, Design Item ID=TC1046VNBTR, DeviceSetName=TC1046VNBTR, DIGIKEY-PURCHASE-URL=https://snapeda.com/shop?store=DigiKey&id=234729, GateName_1=A, Height=1.02mm, Lead Free="Lead Free", Length=3.05mm, LibraryName="MCU Board", Max Supply Voltage (DC)=4.4V, MF=Microchip, Min Supply Voltage (DC)=2.7V, Mounting Technology="Surface Mount", MOUSER-PURCHASE-URL=https://snapeda.com/shop?store=Mouser&id=234729, MP=TC1046VNBTR, Output Current=100uA, Output Type="Analog,Analog Voltage,Voltage", Packaging="Tape and Reel", Pin Count=3, Pins=3, PRICE=None, Radiation Hardening=No, Reach SVHC Compliant=Yes, RoHS Compliant=Yes, Sensor Type=Temperature, Series=-, Source="MCU Board.SCHLIB", SymbolName_1=TC1046VNBTR, Termination=SMD/SMT, Width=1.4mm
U4: "120MHZ 1024KB Flash 128 TQFP PKG inTapeNReel 85CTemp 128 TQFP 14x14x1mm T/R RoHS Compliant: Yes", Case/Package=TQFP, Frequency=120MHz, Max Operating Temperature=85°C, Min Operating Temperature=-40°C, PACKAGE=QFP40P1600X1600X120-128N, AVAILABILITY=Unavailable, Component Type=Standard, Core Architecture=ARM, Design Item ID=ATSAMD51P20A-AU, DeviceSetName=ATSAMD51P20A-AU, GateName_1=G$1, GateName_2=G$2, Interface=I2C,SPI,USB,IrDA,MMC,SD,UART,USART,EBI/EMI, LibraryName="MCU Board", Memory Format=FLASH, Memory Size=1MB, MF=Microchip, MP=ATSAMD51P20A-AU, Number of I/Os=99, Oscillator Type=Internal, Packaging="Cut Tape", Peripherals="Brown-out Detect/Reset,POR,PWM,DMA", Pin Count=108, Pins=128, PRICE=None, Source="MCU Board.SCHLIB", SymbolName_1=ATSAMD51P20A-AU_SECTION1, SymbolName_2=ATSAMD51P20A-AU_SECTION2
U5 U6: library part CMP-006-000003-2, "ATA6561 Series 5 Mbit/s 3 to 5 V ±8 kV Standby Mode CAN Transceiver - SOIC-8", Case/Package=SOIC, Max Operating Temperature=150°C, Max Supply Current=5mA, Max Supply Voltage=5.5V, Min Operating Temperature=-40°C, Min Supply Voltage=4.5V, PACKAGE=VDFN8, Component Type=Standard, Data Rate=5Mbps, Design Item ID=ATA6561, DeviceSetName=ATA6561, GateName_1=G$1, Lead Free="Lead Free", LibraryName="MCU Board", Mounting Technology="Surface Mount", Number of Transceivers=1, Packaging="Cut Tape", Pin Count=8, Pins=8, Receiver Hysteresis=120mV, RoHS Compliant=Yes, Series="Automotive, AEC-Q100", Source="MCU Board.SCHLIB", SymbolName_1=ATA6561
U7: library part CMP-006-000015-2, "KX134 Series 3.6 V ±8g/16g/32g/64g SMT 3 Axis Digital Accelerometer- LGA-12", Case/Package=VFLGA, Max Operating Temperature=105°C, Min Operating Temperature=-40°C, Axis="X, Y, Z", Bandwidth=0.39Hz, Component Type=Standard, Design Item ID=KX134-1211, DeviceSetName=KX134-1211, GateName_1=G$1, LibraryName="MCU Board", Mounting Technology="Surface Mount", Output Type=SPI,I2C, PACKAGE=KX134-1211, Pin Count=10, Series=-, Source="MCU Board.SCHLIB", SymbolName_1=KX134-1211
U8: library part CMP-003-000007-2, "TVS DIODE 5.5VWM SOT143B", PACKAGE=SOT143B, Component Type=Standard, Design Item ID=PRTR5V0U2X_215, DeviceSetName=PRTR5V0U2X_215, GateName_1=G$1, LibraryName="MCU Board", Pin Count=4, Source="MCU Board.SCHLIB", SymbolName_1=PRTR5V0U2X_215
U9: library part CMP-006-000017-2, "1.2AHIGHPSRRLOWDROPOUTLINE", Case/Package=SOT-223-4, Dropout Voltage=350mV, Max Operating Temperature=125°C, Max Supply Voltage=18V, Min Input Voltage=2.5V, Min Operating Temperature=-40°C, Min Output Voltage=3.3V, Output Current=1.2A, PACKAGE=SOT223, Package Quantity=2500, Power Supply Rejection Ratio (PSRR)=65dB, Quiescent Current=250uA, Component Type=Standard, Design Item ID=LDL1117S33R, DeviceSetName=LDL1117S33R, GateName_1=G$1, LibraryName="MCU Board", Mounting Technology="Surface Mount", Number of Outputs=1, Number of Regulators=1, Output Configuration=Positive, Output Type=Fixed, Output Voltage=3.3V, Packaging="Tape and Reel", Pin Count=3, RoHS Compliant=Yes, Series=LDL1117, Source="MCU Board.SCHLIB", SymbolName_1=LDL1117, Weight=0.009171oz
USB: library part CMP-006-000000-3, "CONN USB MICRO B RECPT SMT R/A", Component Type=Standard, Design Item ID=10118192-0001LF, DeviceSetName=10118192-0001LF, GateName_1=G$1, LibraryName="MCU Board", PACKAGE=10118192-0001LF, Pin Count=6, Source="MCU Board.SCHLIB", SymbolName_1=10118192-0001LF
XTAL1: library part CMP-006-000011-2, "Crystal 32.768KHZ 12.5PF SMD", Case/Package=SMD/SMT, Frequency=32.768kHz, Frequency Tolerance=10ppm, Load Capacitance=12.5pF, Max Operating Temperature=85°C, Min Operating Temperature=-40°C, Component Type=Standard, Design Item ID=CM7V-T1A-32.768KHZ-12.5PF-10PPM-TA-QC, DeviceSetName=CM7V-T1A-32.768KHZ-12.5PF-10PPM-TA-QC, ESR=70kR, GateName_1=G$1, Height=0.65mm, Length=3.2mm, LibraryName="MCU Board", Mounting Technology="Surface Mount", PACKAGE=CM7V-T1A-32.768KHZ-12.5PF-10PPM-TA-QC, Pin Count=2, Pins=2, Source="MCU Board.SCHLIB", SymbolName_1=OSCILLATOR, Width=1.5mm
XTAL2: library part CMP-006-000019-2, Component Type=Standard, Design Item ID=RH100-12.000-12-1010-EXT-TR, DeviceSetName=RH100-12.000-12-1010-EXT-TR, GateName_1=G$1, LibraryName="MCU Board", PACKAGE=RH100-12.000-12-1010-EXT-TR, Pin Count=3, Source="MCU Board.SCHLIB", SymbolName_1=CRYSTAL_W_GROUND

## Free pads (board coordinates)
  rect 20.87x180 smd: 1(2862.46,3842.52) 3(2812.46,3842.52) 5(2762.46,3842.52) 7(2712.46,3842.52) 9(2662.46,3842.52) 11(2612.46,3842.52) 13(2562.46,3842.52) 15(2512.46,3842.52) 17(2462.46,3842.52) 19(2412.46,3842.52) 21(2362.46,3842.52) 23(2312.46,3842.52) 25(2262.46,3842.52) 27(2212.46,3842.52) 29(2162.46,3842.52) 31(2062.46,3842.52) 33(2012.46,3842.52) 35(1962.46,3842.52) 37(1912.46,3842.52) 39(1862.46,3842.52) 41(1812.46,3842.52) 43(1762.46,3842.52) 45(1712.46,3842.52) 47(1662.46,3842.52) 49(1612.46,3842.52) 51(1562.46,3842.52) 53(1512.46,3842.52) 55(1462.46,3842.52) 57(1412.46,3842.52) 59(1362.46,3842.52) 61(1312.46,3842.52) 63(1262.46,3842.52) 65(1212.46,3842.52) 67(1162.46,3842.52) 69(1112.46,3842.52) 71(1062.46,3842.52) 73(1012.46,3842.52) 75(962.46,3842.52) 77(912.46,3842.52)
  rect 20.87x180 smd far side: 2(2862.48,3842.52) 4(2812.48,3842.52) 6(2762.48,3842.52) 8(2712.48,3842.52) 10(2662.48,3842.52) 12(2612.48,3842.52) 14(2562.48,3842.52) 16(2512.48,3842.52) 18(2462.48,3842.52) 20(2412.48,3842.52) 22(2362.48,3842.52) 24(2312.48,3842.52) 26(2262.48,3842.52) 28(2212.48,3842.52) 30(2162.48,3842.52) 32(2062.48,3842.52) 34(2012.48,3842.52) 36(1962.48,3842.52) 38(1912.48,3842.52) 40(1862.48,3842.52) 42(1812.48,3842.52) 44(1762.48,3842.52) 46(1712.48,3842.52) 48(1662.48,3842.52) 50(1612.48,3842.52) 52(1562.48,3842.52) 54(1512.48,3842.52) 56(1462.48,3842.52) 58(1412.48,3842.52) 60(1362.48,3842.52) 62(1312.48,3842.52) 64(1262.48,3842.52) 66(1212.48,3842.52) 68(1162.48,3842.52) 70(1112.48,3842.52) 72(1062.48,3842.52) 74(1012.48,3842.52) 76(962.48,3842.52) 78(912.48,3842.52)

## Via types
v1: diameter 17.5, hole 10, Top Layer to Bottom Layer, 115 vias
v2: diameter 17.48, hole 10, Top Layer to Bottom Layer, 2 vias
v3: diameter 59.06, hole 40, Top Layer to Bottom Layer, 1 vias
v4: diameter 50, hole 28, Top Layer to Bottom Layer, 1 vias

## Nets (pads, with @x,y where several pads share a name; then routed paths per layer and width w, separated by ;. In a path a pad name is that pad's centre, name@x,y a point inside that pad or via, vN(x,y) a via of type N, cw(c..) or ccw(c..) an arc to the next point about the centre after c; other vN are vias at no path point)
1W: U1.2
3.3V_FUSED: F1.2 J1.1 L1.1 | length 3867.1
  Top Layer w11.55: L1.1 425.06,3405.65 370.6,3405.65 358.9,3417.35 256.68,3417.35 179,3339.67 179,2004 637.8,1545.2 637.8,587.2 672,553 903.15,553 J1.1
  Top Layer w40: L1.1 574.8,3507.87 F1.2
3V3: F1.1 pad.3 pad.4 pad.73 pad.74 pad.75 pad.76 pad.78 | length 1236.8
  Top Layer w11.55: v1(2812.48,3692.41) pad.3
  Top Layer w20: v1(962.48,3724.41) pad.75 ; v1(962.48,3724.41) pad.73@1012.46,3774.39
  Top Layer w40: F1.1 846.46,3507.87 962.48,3623.9 v1(962.48,3724.41)
  Bottom Layer w11.55: pad.78@912.48,3774.41 pad.78 ; v1(962.48,3724.41) 996.37,3758.3 1007.82,3758.3 1012.48,3762.95 pad.74 ; v1(2812.48,3692.41) pad.4
  Bottom Layer w20: pad.78@912.48,3774.41 v1(962.48,3724.41) pad.76
+5V: C12.2 C16.2 C17.2 pad.1 pad.2 U5.3 U6.3 | length 3972.6
  Top Layer w11.55: C16.2 C17.2 2424,1190.94 2432,1198.94 2432,1255 2463.02,1286.02 U6.3 2533.02,1286.02 2543,1296 2543,1416 2491,1468 2491,1628 2549.1,1686.1 2549.1,1721 2523.45,1746.65 U5.3 v1(2436.05,1746.65) 2400,1746.65 2354.33,1700.98 C12.2 ; v1(2862.46,3687) pad.1
  Bottom Layer w11.55: v1(2436.05,1746.65) 3442,2752.6 3442,3027 2862.48,3606.52 v1(2862.46,3687) pad.2
A0: pad.22 U4.7
A1: pad.20 U4.4
A2: pad.18 U4.127
A3: pad.16 U4.126
A4: pad.14 U4.125
A5: pad.12 U4.124
A6: pad.10 U4.123
A7: pad.8 U4.8
A12: pad.31 U4.11
A13: pad.33 U4.12
ACCEL_CS: TP15.1 U4.81 U7.10 | length 652
  Top Layer w10: U7.10@1122.05,960.14 v1(1122.05,992.13)
  Top Layer w11.55: v1(677.17,799.21) TP15.1 ; v1(1122.05,992.13) v1@1122.54,991.63
  Bottom Layer w10: v1(677.17,799.21) 929.13,799.21 v1(1122.05,992.13)
ACCEL_INT_1: TP11.1 U4.73 U7.5 | length 450.6
  Top Layer w10: TP11.1 800.2,1074.8 868.7,1006.3 868.7,974.25 980.75,862.2 1066.93,862.2 1082.44,877.72 U7.5@1082.44,900.35
ACCEL_INT_2: TP13.1 U4.72 U7.6 | length 406.5
  Top Layer w10: TP13.1 800.2,933.07 886.06,847.2 1073.14,847.2 1102.36,876.42 U7.6
ACCEL_TRIG: U4.80 U7.4
CAN0_H: R16.2 U5.7 | length 155.8
  Top Layer w10: U5.7 2755.32,1796.65 R16.2@2812.99,1854.33
  Top Layer w11.55: R16.2@2812.99,1854.33 R16.2
CAN0_L: R17.1 U5.6 | length 149.3
  Top Layer w10: U5.6 2771.06,1746.65 R17.1@2812.99,1704.72
  Top Layer w11.55: R17.1 R17.1@2812.99,1704.72
CAN0_RX: TP17.1 U4.93 U5.4 | length 992.9
  Top Layer w11.55: TP17.1 2299.21,977.79 2221,1056 2221,1294 2431,1504 2431,1650.65 2477,1696.65 U5.4 v1(2524.58,1696.65)
CAN0_STBY: U4.105 U5.8 | length 1196.7
  Top Layer w10: v1(1724.41,1610.24) U4.105
  Top Layer w11.55: v1(2649.61,1846.46) 2649.71,1846.56 2692.82,1846.56 U5.8
  Bottom Layer w11.55: v1(1724.41,1610.24) 1725.55,1609.1 1725.55,1589.41 1767.92,1547.04 2220.27,1547.04 2395.36,1722.13 2446.21,1722.13 2460.58,1736.5 2460.58,1747.77 2467.35,1754.54 2559.26,1846.46 v1(2649.61,1846.46)
CAN0_TX: TP18.1 U4.92 U5.1 | length 1297.2
  Top Layer w11.55: TP18.1 2459.82,885.82 2470,896 2470,1202 2473,1205 2599.53,1205 2606.3,1211.77 2606.3,1397.89 2519,1485.19 2519,1624 2565.65,1670.65 2565.65,1809 2528,1846.65 U5.1 v1(2436.05,1846.65)
CAN1_H: R18.2 U6.7 | length 406.8
  Top Layer w11.55: U6.7 v1(2855,1336.02) ; v1(2902,1520) 2946.85,1520 R18.2
  Bottom Layer w11.55: v1(2855,1336.02) 2902,1383.02 v1(2902,1520)
CAN1_L: R20.1 U6.6 | length 138.1
  Top Layer w11.55: U6.6 2753,1286.02 2787.06,1251.97 R20.1
CAN1_RX: TP20.1 U4.44 U6.4 | length 474.4
  Top Layer w11.55: U6.4 2559.62,1236.02 2564.37,1231.28 v1(2566.93,1231.28) ; TP20.1 v1(2692.91,1083.09)
  Bottom Layer w11.55: v1(2566.93,1231.28) 2568.74,1229.47 2568.74,1207.26 v1(2692.91,1083.09)
CAN1_STBY: U4.104 U6.8
CAN1_TX: TP19.1 U4.43 U6.1 | length 837.4
  Top Layer w11.55: v1(2425.2,1385.83) 2425.3,1385.93 2495.97,1385.93 U6.1 ; v1(2479,808) 2559.06,808 TP19.1
  Bottom Layer w11.55: v1(2425.2,1385.83) 2405.51,1366.14 2405.51,881.49 v1(2479,808)
DAC0: pad.41 U4.22
DAC1: pad.37 U4.9
DEBUG_0: R32.2 U4.68 | length 41.3
  Top Layer w11.55: v1(281.52,921.26) R32.2@322.83,921.26
DEBUG_1: R33.2 U4.69 | length 41.3
  Top Layer w11.55: v1(376.01,905.51) R33.2
GND: C1.2 C2.2 C3.2 C4.1 C5.1 C6.1 C7.2 C9.1 C10.2 C11.1 C12.1 C13.1 C14.2 C15.2 C16.1 C17.1 C18.2 C19.1 C20.2 C21.2 C22.2 C100.2 C101.2 C102.2 C103.2 C104.2 C105.2 C106.2 C107.2 C108.2 C109.2 C110.2 C111.2 C112.2 C113.2 C114.2 C115.2 DEBUG1.2 DEBUG2.2 J2.3 J2.5 MICRO_SD.6 MICRO_SD.9 MICRO_SD.11 MICRO_SD.12 MICRO_SD.13 MICRO_SD.14 pad.6 pad.17 pad.21 pad.24 pad.25 pad.32 pad.35 pad.39 pad.43 pad.45 pad.60 pad.63 pad.64 pad.67 pad.68 pad.71 pad.72 pad.77 R23.1 R31.1 SD_ACTIVITY.2 STATUS.1 STATUS.2 STATUS.3 U1.3 U1.7 U1.8 U2.2 U3.3 U4.5 U4.14 U4.25 U4.31 U4.38 U4.45 U4.53 U4.64 U4.78 U4.90 U4.96 U4.106 U4.116 U5.2 U6.2 U7.8 U7.9 U9.1 USB.5 XTAL2.2 XTAL2.4 | length 7699.8
  Top Layer w10: v1(547,2988) 566.87,3007.87 C4.1 ; v1(1084.65,1801.21) 1084.65,1799.18 1100.39,1783.43 C11.1 ; U7.8@1122.54,925.2 1122.54,930.61 1128.94,937.01 v1(1165.35,937.01) ; v1(1295.28,1771.65) 1295.28,1769.88 1326.77,1738.39 XTAL2.2 ; C5.1 2381.89,2509.84 v1(2381.89,2456.69) C6.1
  Top Layer w11.54: v1(1162.48,3736.72) pad.67
  Top Layer w11.55: v1(255.91,3381.89) 257.52,3381.89 259.49,3379.92 C7.2 ; DEBUG1.2 336.75,560.89 370.57,560.89 372.41,559.06 v1(374.02,559.06) 375.63,559.06 379.56,555.12 DEBUG2.2 v1(484.25,555.12) 531.5,555.12 SD_ACTIVITY.2 ; U1.3 396.65,2746.65 ; v1(445,2795) 396.65,2746.65 ; C1.2 482.28,2989 546,2989 v1(547,2988) ; U1.7 508.87,2796.65 512,2846.65 ; U1.8 512,2846.65 ; C2.2 v1(667.29,3281.5) ; MICRO_SD.13 v1(740.95,2869.66) ; MICRO_SD.14 v1(749.61,3284.22) ; v1(899.63,1031.5) C18.2 ; pad.77 912.92,3842.06 912.92,3724.87 v1(913.39,3724.41) ; v1(948.82,2740.16) 949.41,2740.75 999.21,2740.75 MICRO_SD.9 ; C21.2 v1(1094.46,639.76) ; v1@1062,3736.72 1062,3832.54 1062.46,3833 pad.71 ; v1(1062.48,3736.72) pad.71 ; v1(1084.65,1801.21) C9.1 ; MICRO_SD.6 1118.9,3261.34 1128,3270.44 v1(1134.9,3270.44) ; pad.67@1162,3832.54 1162.46,3833 pad.67 ; v1(1218.53,1033.47) C15.2 ; v1(1232.03,3146.48) 1244.13,3146.48 1248.03,3150.38 MICRO_SD.11 ; v1(1251.18,2712.23) MICRO_SD.12 ; v1@1262,3736.72 1262,3832.54 1262.46,3833 pad.63 ; v1(1262.48,3736.72) pad.63 ; XTAL2.4 1263.78,1812.8 1294.14,1782.44 1294.14,1772.79 v1(1295.28,1771.65) ; U9.1 v1(1474.46,464.57) ; v1(1490.19,2551.18) U3.3 ; v1(1503.94,688.98) 1545.28,688.98 C20.2 ; C22.2 1616.14,448.82 v1(1665.35,448.82) 1708.66,448.82 R31.1@1716.54,456.69 ; v1(1635.86,622.05) R23.1 ; pad.45 pad.45@1712.46,3842 ; v1(1732.28,3720.47) 1731.53,3720.47 1712.46,3739.54 pad.45@1712.46,3842 ; pad.35 1962.46,3741.46 1918.51,3697.51 1908.95,3697.51 1864.12,3742.34 1864.12,3840.86 pad.39 1862.46,3936 1849.46,3949 1775.46,3949 1762.46,3936 pad.43 1762.46,3842 pad.45@1712.46,3842 ; v1(2047.24,494.12) USB.5 ; v1(2246.09,1131.89) C16.1 ; pad.25 2262.46,3939.46 2272,3949 2352,3949 2362.46,3938.54 pad.21 2362.46,3724.66 v2(2362.2,3724.41) ; U2.2 v1(2295.28,3169.26) ; v1(2313.02,1604.33) C12.1 ; v1(2348.45,1131.89) C17.1 ; 2400,3701 2421,3701 v1(2456,3666) 2456,3700.54 2462.46,3707 pad.17 ; v1(2430.04,1322.83) 2431.65,1322.83 2444.15,1335.33 2495.37,1335.33 U6.2 ; v1(2436.05,1796.65) U5.2 ; C19.1 2517.72,1168.82 2528,1179.11 v1(2533.72,1179.11) ; C13.1 v1(2557.09,1616.11) ; v1(2586.61,621.57) J2.5 ; v1(2636.61,621.57) J2.3 ; v1(2685.04,2943.53) C3.2 ; v1(2807.09,1779.53) C10.2 ; C14.2 v1(2927.16,1442.89) ; v1(3147.67,744.09) STATUS.2@3177,744.09 ; STATUS.3 3177,713.78 STATUS.2@3177,744.09 ; STATUS.2 STATUS.2@3177,744.09 ; STATUS.1 3177,774.41 STATUS.2@3177,744.09 ; 396.65,2746.65 444.9,2795.1 496.26,2846.65 512,2846.65
  Bottom Layer w11.54: v1(1162.48,3736.72) pad.68
  Bottom Layer w11.55: v1(1062.48,3736.72) pad.72 ; v1(1262.48,3736.72) pad.64 ; v1(1362.2,3728.35) 1362.34,3728.48 1362.34,3842.38 pad.60 ; v1(1564.94,2248.03) 1594.47,2277.56 1866.94,2277.56 ; v1(1655.51,1801.21) C101.2 ; v1(1655.51,1895.7) C105.2 ; v1(1655.51,1982.31) C108.2 ; v1(1655.51,2076.8) C111.2 ; v1(1667.32,2159.48) C115.2 ; C113.2 1863,2273.62 1866.94,2277.56 ; C103.2 v1(1879.89,1864.17) ; C112.2 1866.94,2277.56 ; v1(1919.29,2051.21) C109.2 ; v1(2035.43,3685.04) 2062.48,3712.09 pad.32 ; C106.2 C107.2 2100.39,2072 2106.3,2077.9 C110.2 2106.3,2207 2108.27,2207 C114.2 2108.27,2259.03 2124.74,2275.5 v1(2124.74,2288.98) ; C102.2 2102.36,1605.74 v1(2104.83,1603.27) ; C104.2 2106.3,1574.04 v1(2108.77,1571.57) ; C100.2 v1(2242.1,1801.18) ; pad.24 2312.48,3762.95 2349.89,3725.54 2361.07,3725.54 v2(2362.2,3724.41) ; v1(2750,3573) 2762.48,3585.48 pad.6
  other v2: 1913.39,3696.85
GPIO0: pad.58 U4.42
GPIO1: pad.56 U4.49
GPIO2: pad.54 U4.50
GPIO3: pad.52 U4.51
GPIO4: pad.50 U4.52
GPIO5: pad.48 U4.55
GPIO6: pad.46 U4.56
GPIO7: pad.44 U4.57
GPIO8: pad.42 U4.24
GPIO9: pad.40 U4.23
GPIO10: pad.38 U4.21
GPIO11: pad.36 U4.20
GPIO12: pad.34 U4.19
GPIO13: pad.30 U4.18
GPIO14: pad.28 U4.17
GPIO15: pad.26 U4.16
GPIO22: pad.27 U4.98
GPIO23: pad.29 U4.99
I2C0_SCL: pad.69 R13.1 U1.4 U4.48 | length 2204.3
  Top Layer w11.55: U1.4 329,2696.65 329,2682 384,2627 567,2627 602,2592 602,2563 ; R13.1 602,2236.22 602,2563 ; pad.69 1112.46,3571.73 795,3254.27 795,3043 662,2910 662,2623 602,2563
I2C0_SDA: pad.65 R12.1 U1.5 U4.47 | length 1940.6
  Top Layer w11.55: U1.5 v1(587,2696.65) ; R12.1 v1(641.73,2487) 641.73,2555.12 696.85,2610.24 696.85,2893.7 826.77,3023.62 826.77,3236.22 1212.46,3621.91 pad.65
  Bottom Layer w11.55: v1(587,2696.65) 587,2541.73 v1(641.73,2487)
I2C1_SCL: pad.23 R30.1 U4.61 | length 3792.1
  Top Layer w11.55: pad.23 2312.46,3656.54 2351,3618 2775,3618 2953,3440 3199,3440 3493,3146 3493,981.5 3480,968.5 R30.1
I2C1_SDA: pad.19 R29.1 U4.60 | length 4087.9
  Top Layer w11.55: v1(2412,3726) 2412.46,3726.46 pad.19 ; v1(2652,3726) 2742,3636 2830,3636 2934,3532 3466,3532 3510,3488 3510,951 3488,929 3368,929 3354.33,942.67 R29.1 v1(3313.02,968.51)
  Bottom Layer w11.55: v1(2412,3726) v1(2652,3726)
MCU_RESET: C8.2 R14.1 R15.1 U4.114 | length 241.9
  Top Layer w11.55: C8.2 2482.28,2110.24 R14.1 ; R14.1@2594.49,2114.17 R15.1
MOSI: R10.1 U4.27 | length 41.3
  Top Layer w11.55: v1(1181.1,2482.31) R10.1
NetC10_1: C10.1 R16.1 R17.2 | length 173.2
  Top Layer w10: R17.2 C10.1 R16.1
NetC14_1: C14.1 R18.1 R20.2 | length 296.7
  Top Layer w11.55: R18.1 2840.55,1467.56 2868.11,1440 C14.1 2868.11,1370.05 2938.98,1299.18 R20.2
NetC21_1: C21.1 J1.2 U9.2 U9.4 | length 691.9
  Top Layer w11.55: J1.2 803.15,611 936,611 1013.54,533.46 C21.1 1104,533.46 1125.65,555.12 U9.4 U9.2
NetC22_1: C22.1 R31.2 U8.1 USB.6 USB.7 USB.8 USB.9 USB.10 USB.11 | length 1171.3
  Top Layer w11.55: C22.1 1620.08,505.9 1641.73,527.56 1716.54,527.56 1794,527.56 1795.97,529.53 USB.6@1846,529.53 ; USB.6 USB.6@1846,529.53 ; U8.1 1921.26,712 1930.26,703 2048,703 2090,661 2090,529.53 USB.7 2145.67,529.53 USB.9 USB.11 USB.10 USB.8 1846,429.13 USB.6@1846,529.53
NetDEBUG1_1: DEBUG1.1 R32.1 | length 200.8
  Top Layer w11.55: DEBUG1.1 R32.1
NetDEBUG2_1: DEBUG2.1 R33.1 | length 215.2
  Top Layer w11.55: R33.1 433.07,818.9 DEBUG2.1
NetJ2_7: J2.7
NetJ2_8: J2.8
NetJ2_9: J2.9
NetQ1_1: Q1.1 R7.2 | length 245.8
  Top Layer w11.55: R7.2 v1(2110.24,3204.24) ; v1(2224.9,3318.9) Q1.1
  Bottom Layer w11.55: v1(2110.24,3204.24) v1(2224.9,3318.9)
NetQ1_3: Q1.3 R3.2 | length 216.5
  Top Layer w11.55: R3.2 Q1.3
NetR1_1: R1.1 SD_ACTIVITY.1 | length 186.4
  Top Layer w11.55: R1.1 521.52,811.02 539.37,793.18 SD_ACTIVITY.1
NetR7_1: R7.1 U2.4 | length 190
  Top Layer w11.55: R7.1 2224.41,3090.55 2257.87,3057.09 U2.4
NetR19_1: R19.1 U7.2 | length 596.8
  Top Layer w10: U7.2 1062.42,940.53 1051.97,940.53 1043.09,949.42 1043.09,1007.65 1146.73,1111.3 1485.32,1111.3 1503.94,1129.92 R19.1
NetR21_1: R21.1 U7.12 | length 545.6
  Top Layer w10: U7.12 1082.68,986.34 1166.45,1070.12 1362.95,1070.12 R21.1
NetR22_1: R22.1 U7.1 | length 552.5
  Top Layer w10: U7.1 1062.5,999.51 1153.54,1090.55 1444.88,1090.55 1507.88,1027.56 R22.1
NetR26_1: R26.1 STATUS.6 | length 420.5
  Top Layer w11.55: R26.1 2976.38,864 3015.38,825 3200,825 3223.82,801.18 STATUS.6
NetR27_1: R27.1 STATUS.5 | length 363.5
  Top Layer w11.55: R27.1 3106.3,924 3160.3,870 3218,870 3256,832 3256,752.09 3248,744.09 STATUS.5
NetR28_1: R28.1 STATUS.4 | length 320.5
  Top Layer w11.55: R28.1 3220.47,928 3273,875.47 3273,736 3250.78,713.78 STATUS.4
NetU1_6: U1.6
NetU4_58: U4.58
NetU4_59: U4.59
NetU4_74: U4.74
NetU4_75: U4.75
NetU4_88: U4.88
NetU4_89: U4.89
NetU4_100: U4.100
NetU4_101: U4.101
NetU4_108: U4.108
NetU4_109: U4.109
NetU4_110: U4.110
NetU4_111: U4.111
NetU4_112: U4.112
NetU4_113: U4.113
NetUSB_4: USB.4
PORT0: pad.15
PORT1: pad.13
PORT2: pad.11
PORT3: pad.9
PORT4: pad.7
PORT5: pad.5
RESET: J2.10 R15.2 | length 2454.2
  Top Layer w11.55: J2.10 2486.61,460 2511.61,435 2865,435 2910,480 2910,1068 3017,1175 3017,1963.04 2795,2185.04 R15.2